# Altium PCB PCB1.PcbDoc (part 1 of 2)
Units mm, origin at the board's own origin, x right, y up, seen from the top; angles counter-clockwise.
Board outline 100 x 100 mm, 4 copper layers (Top Layer, GND, PWR, Bottom Layer), stack 0.603 mm thick; 73 components, 79 nets, 277 pads, 87 vias.
Unrouted connection lines stored in the file: 25.
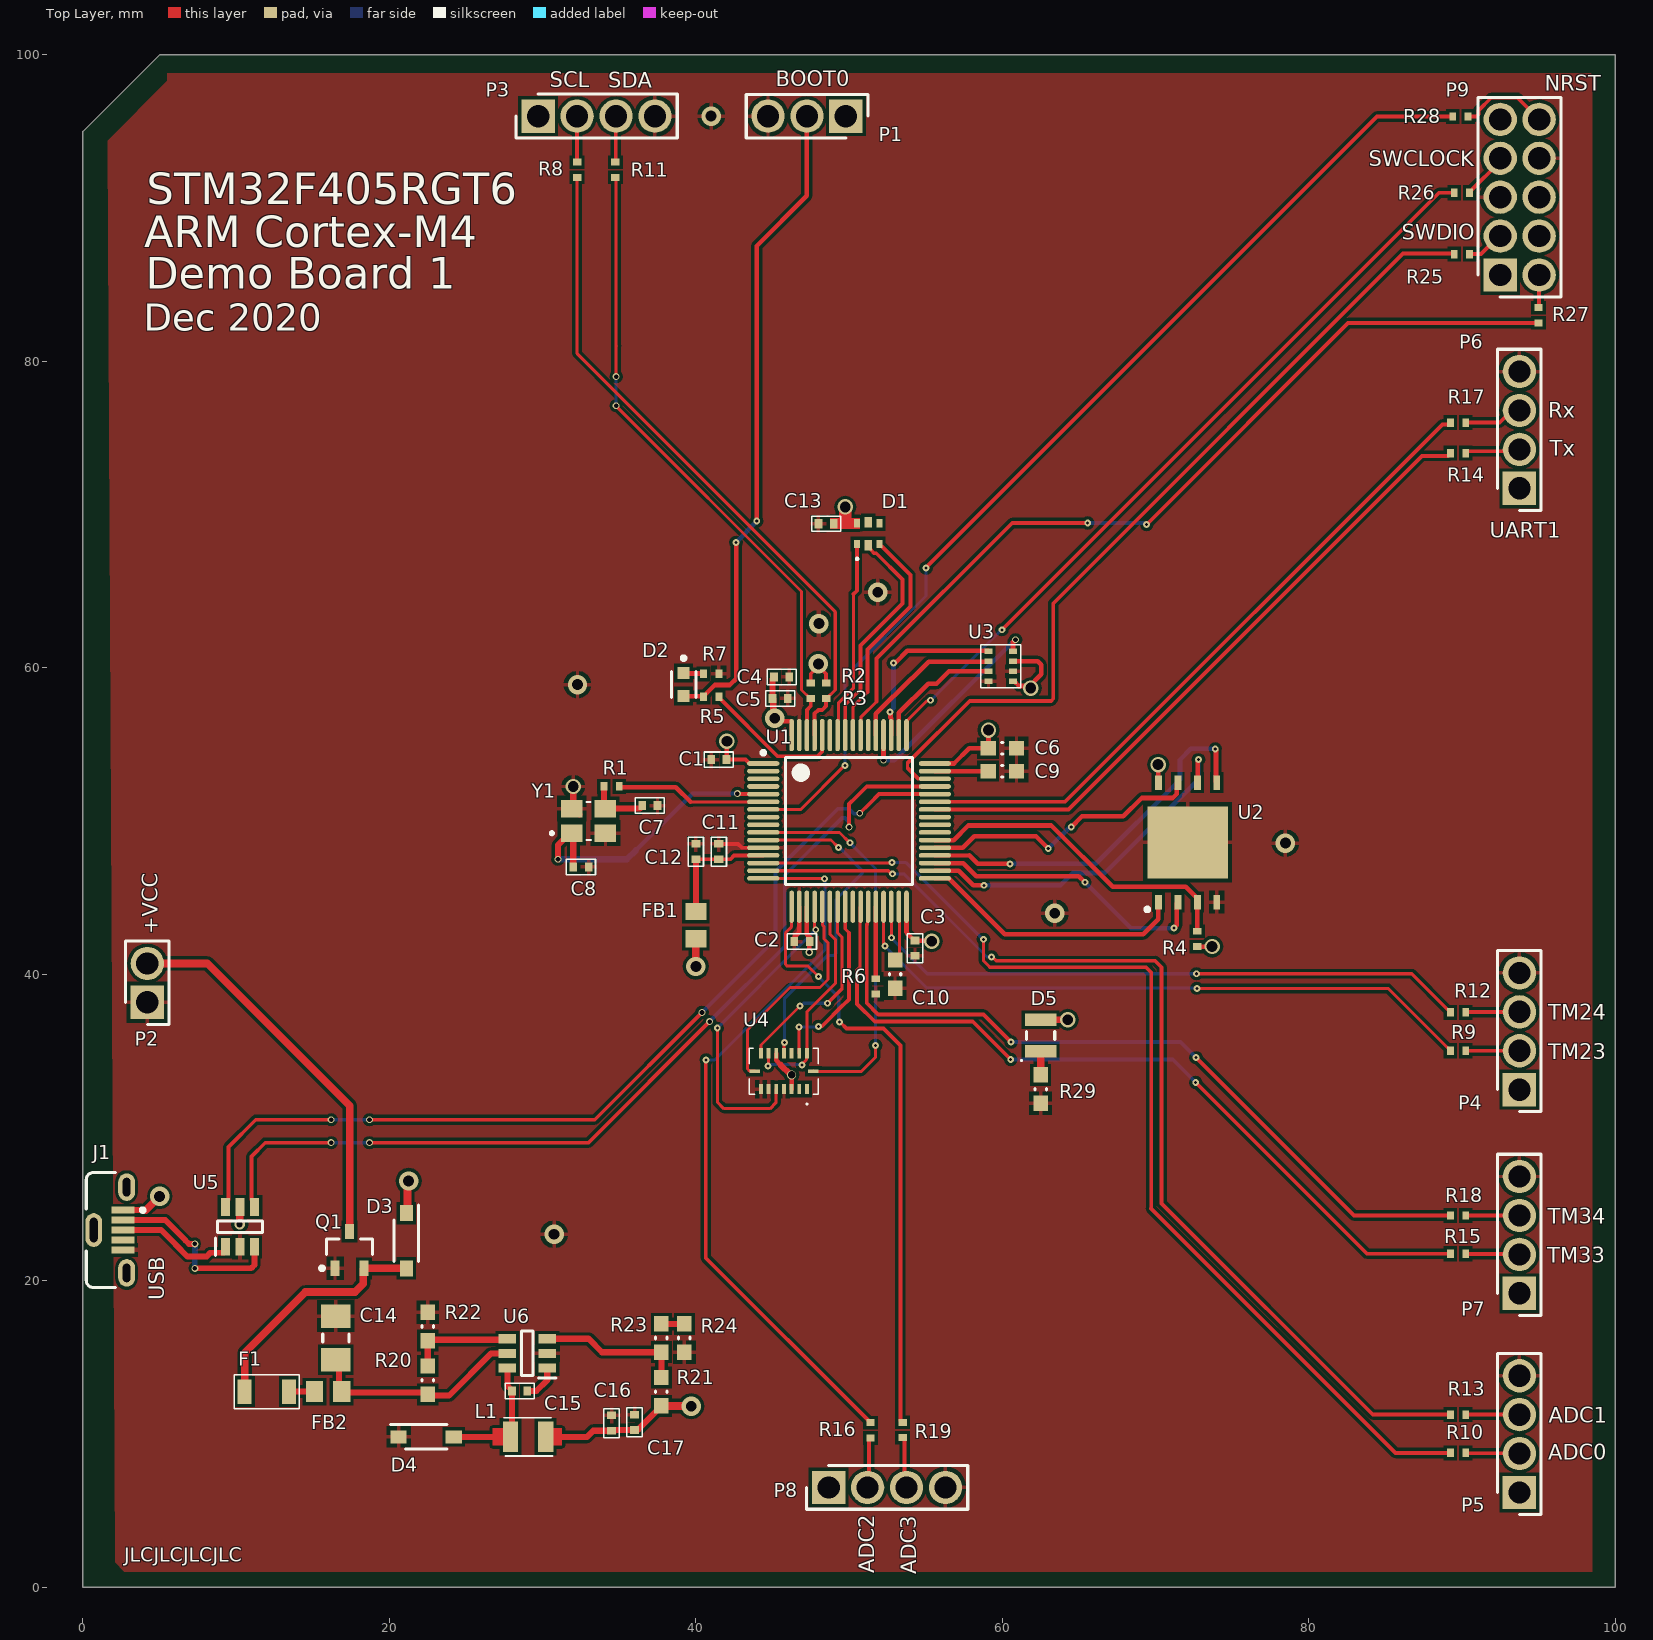
[diagram p0: Top Layer view]
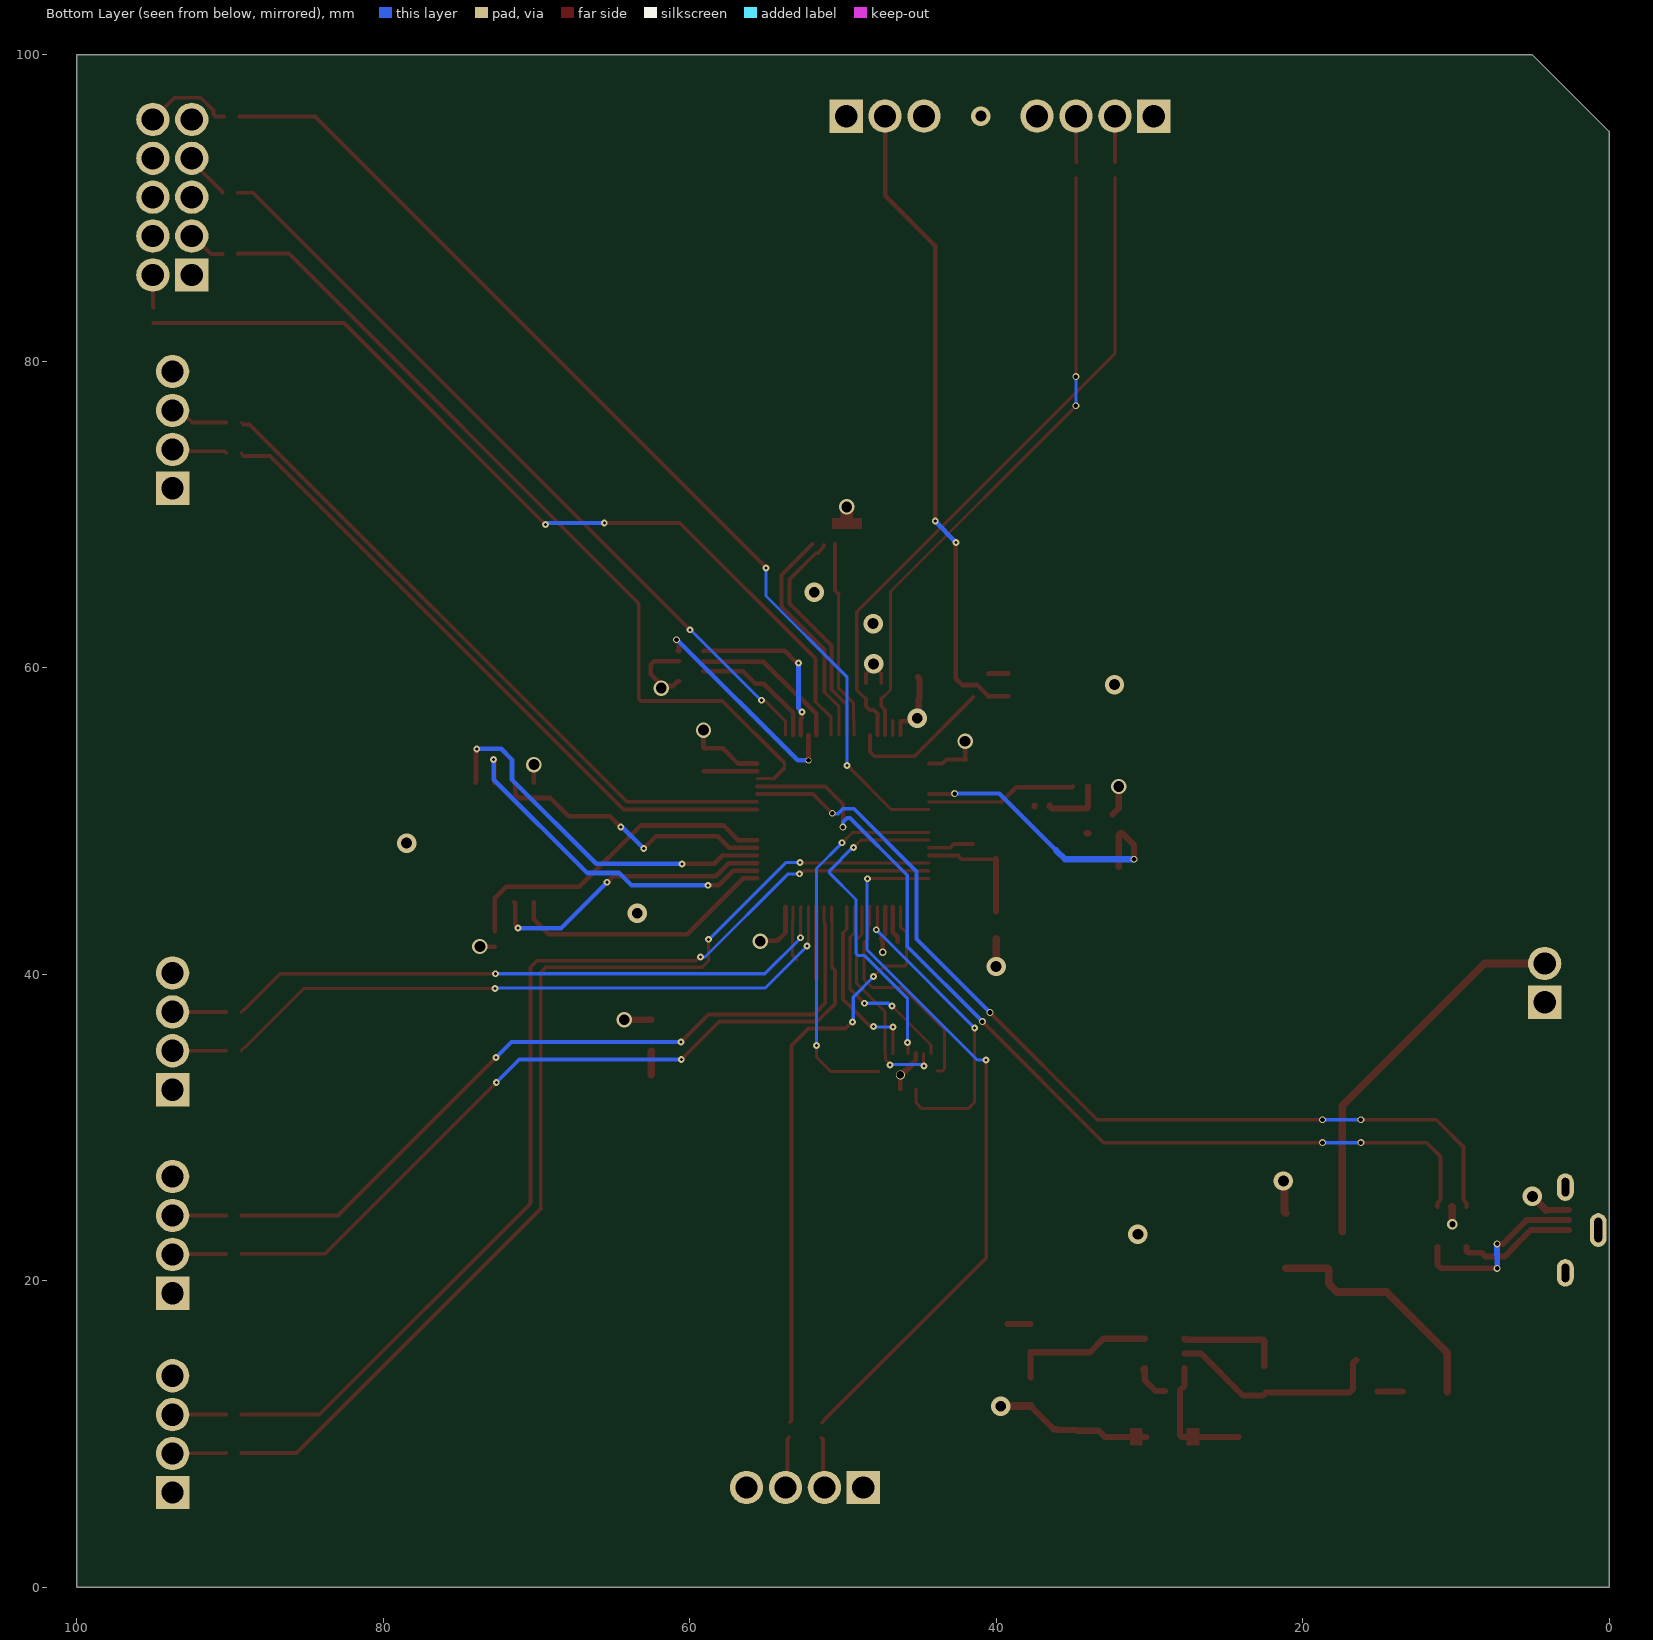
[diagram p1: Bottom Layer view, seen from below]
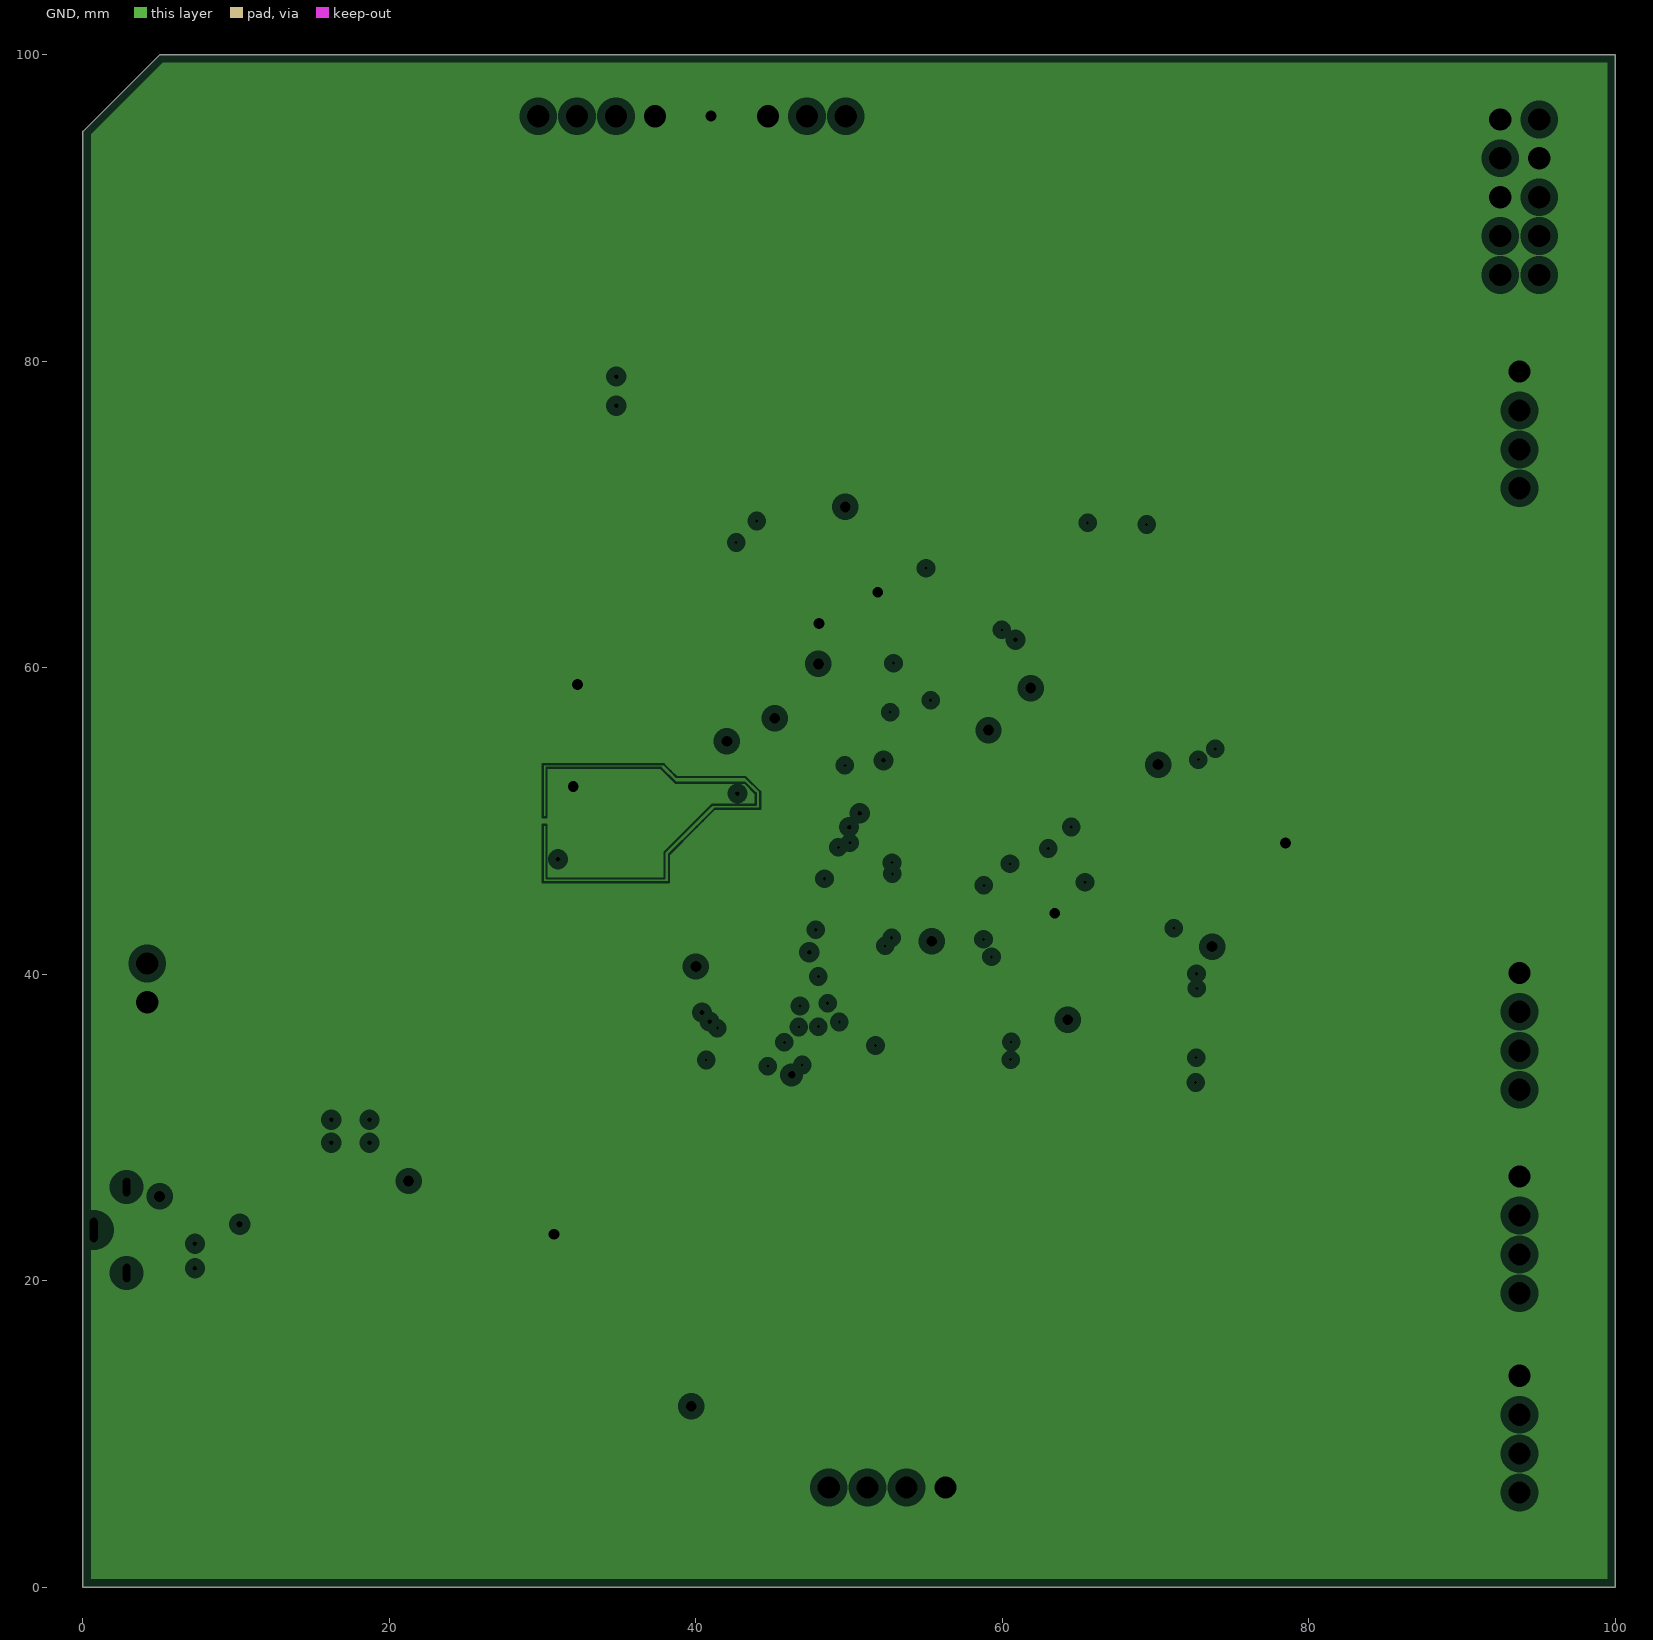
[diagram p2: GND, clearances drawn from the general rule]
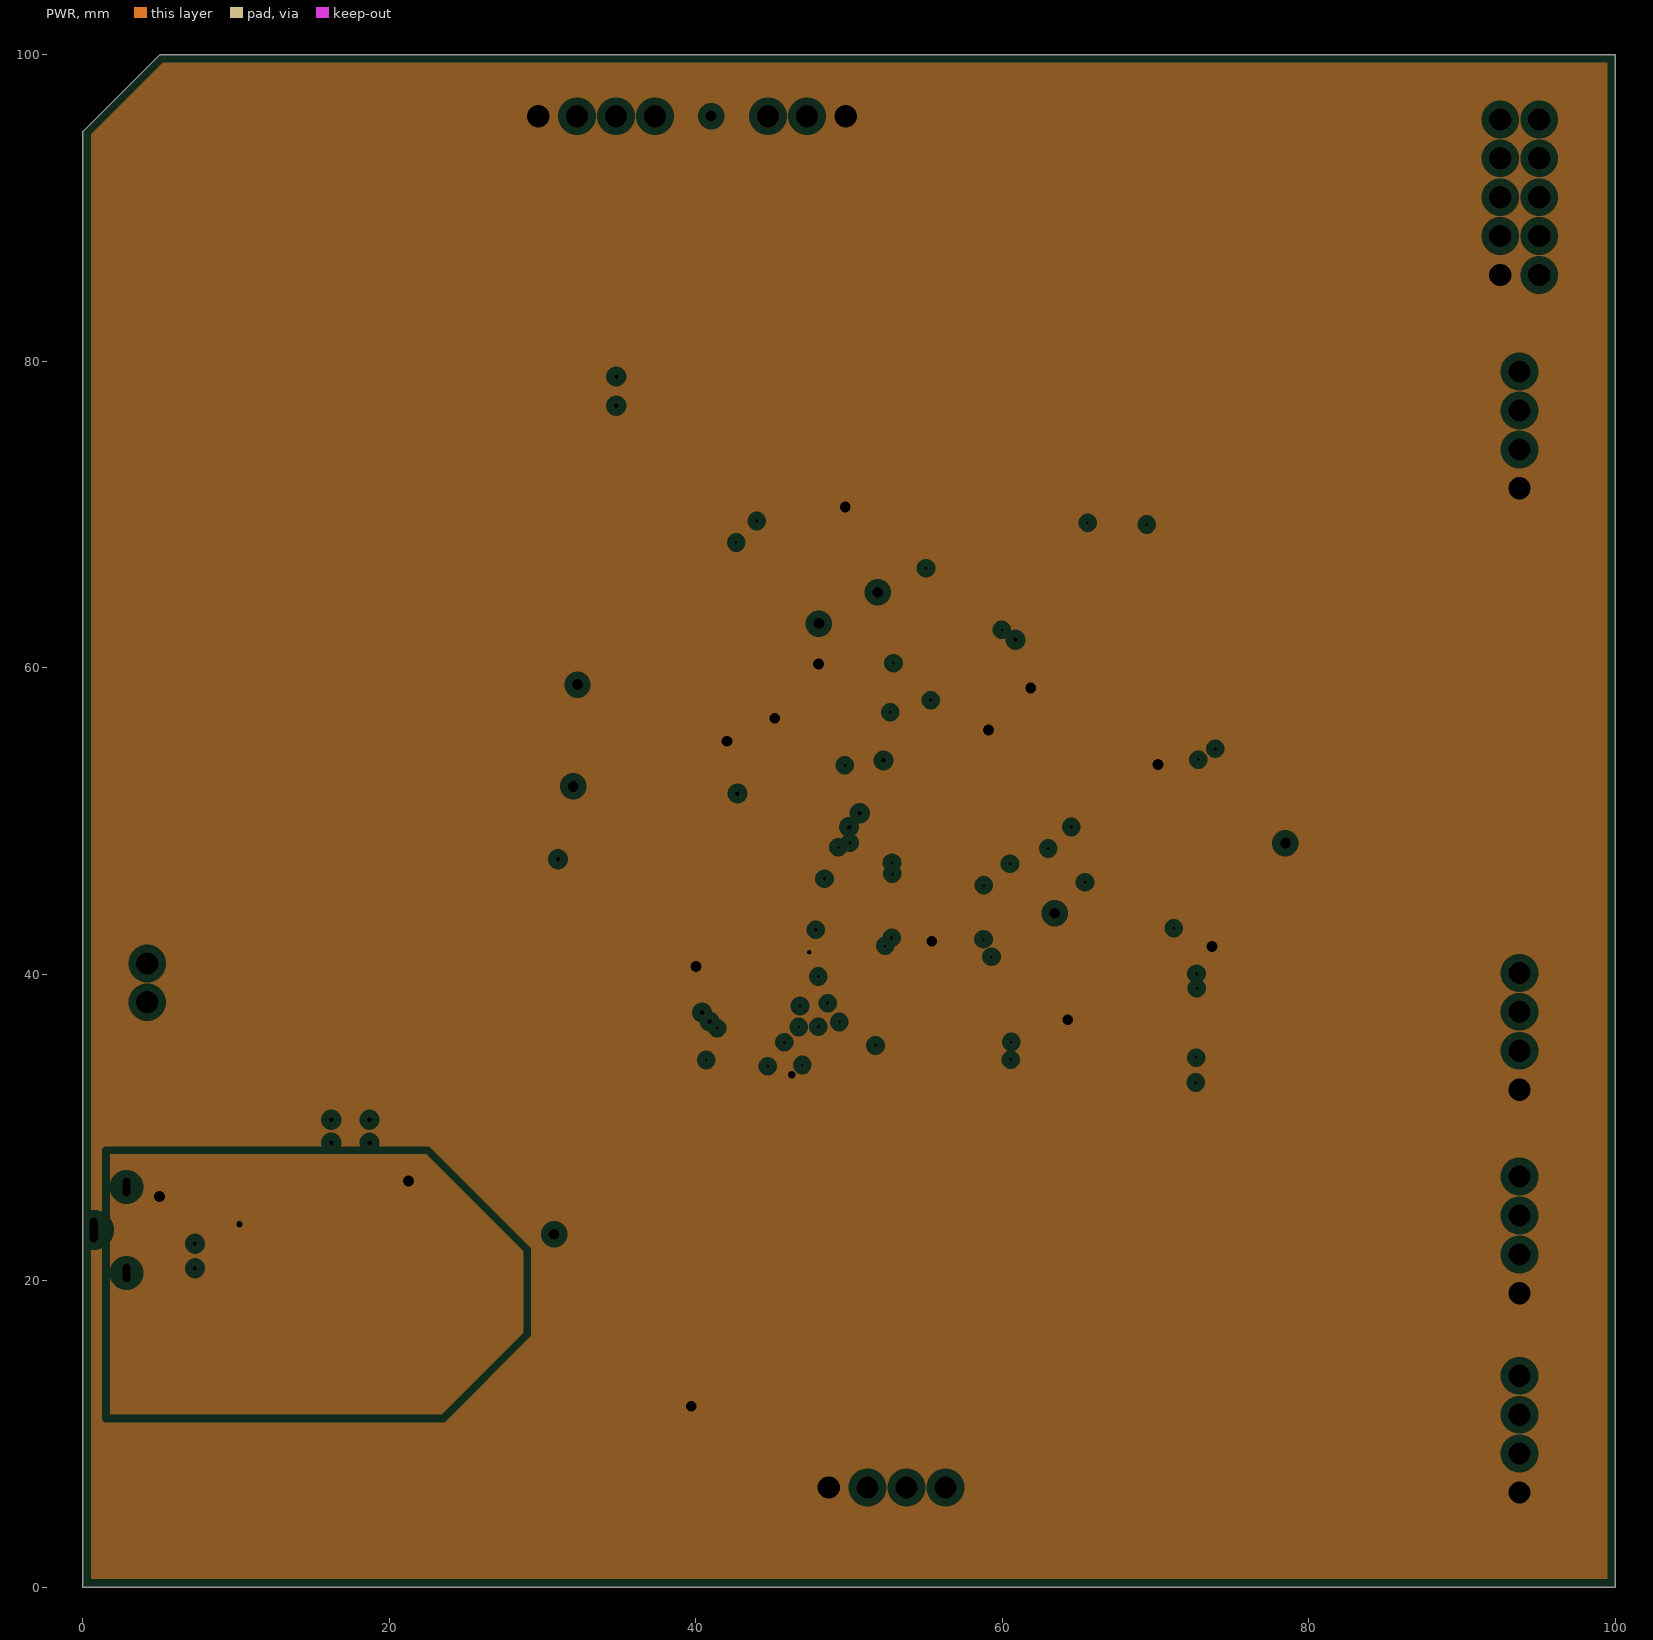
[diagram p3: PWR, clearances drawn from the general rule]
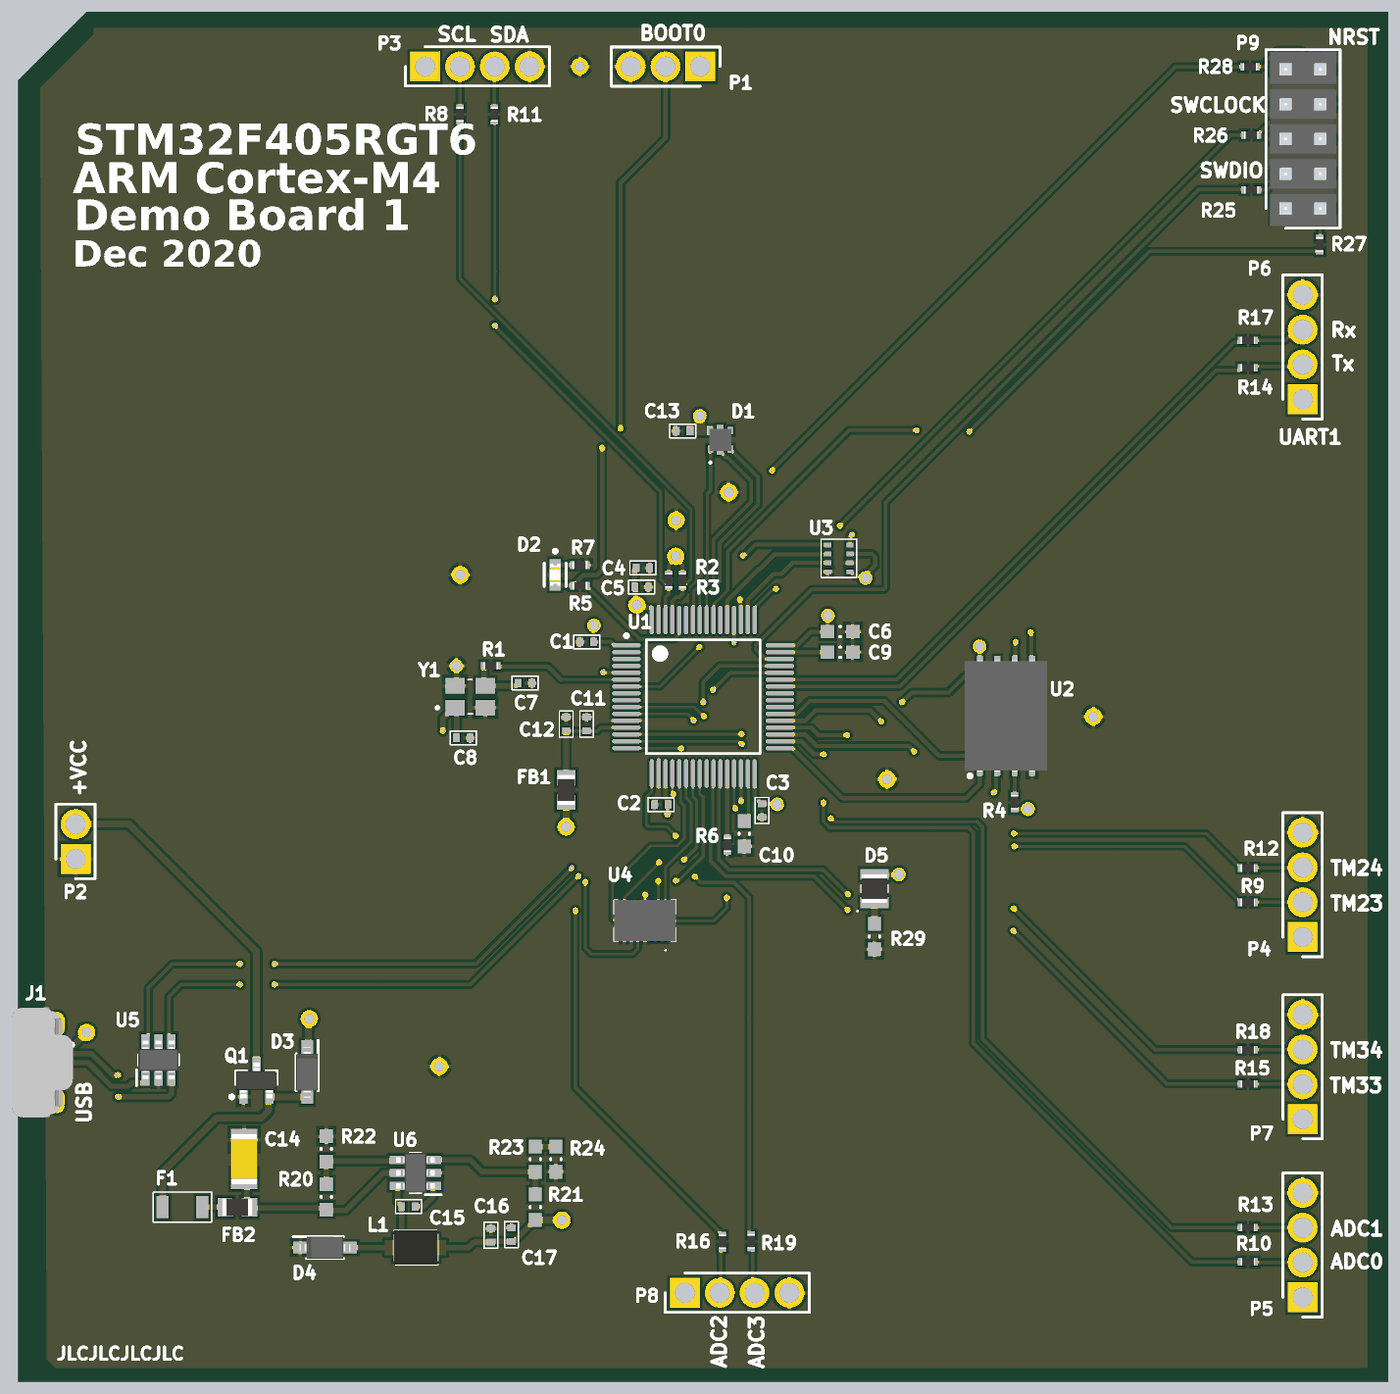
[diagram p4: 3D render of the assembled board from above, using the file's embedded part models]

## Layer stack, top to bottom
Top Solder: solder mask 0.0102, Solder Resist, Dk 3.5
Top Layer: signal copper 0.0356
Dielectric 2: prepreg 0.0711, PP-006, Dk 4.1
GND: plane copper 0.035, net GND
Dielectric 1: dielectric 0.32, FR-4, Dk 4.8
PWR: plane copper 0.035, net (Multiple Nets)
Dielectric 3: prepreg 0.0711, PP-006, Dk 4.1
Bottom Layer: signal copper 0.0356
Bottom Solder: solder mask 0.0102, Solder Resist, Dk 3.5

## Board outline
5,100 0,95 0,0 100,0 100,100

## Design rules (kind name [scope] priority, off if disabled: settings)
Clearance [All] p1: gap=0.2 ignorepadtopadclearanceinfootprint=TRUE except(0: Arc-Hole Track-Hole SMDPad-Hole THPad-Hole Via-Hole Fill-Hole Poly-Hole Region-Hole Text-Hole; 0.127: SMDPad-SMDPad; 0.15: Arc-Text Track-Text SMDPad-Text THPad-Text Via-Text Fill-Text Poly-Text Region-Text Text-Text; 0.54: THPad-THPad)
DiffPairsRouting [All] p1: maxlimit=2 minlimit=0.1 mostfreqgap=1 toplayer_minwidth=0.2 toplayer_maxwidth=0.5 toplayer_prefwidth=0.3 bottomlayer_minwidth=0.2 bottomlayer_maxwidth=0.5 bottomlayer_prefwidth=0.3 maxuncoupledlength=12.7
FanoutControl Fanout_Small [(CompPinCount < 5)] p4 off: bgadir=Out bgaviamode=Centered fanoutstyle=Auto fanoutdirection=OutThenIn viagrid=0.025 // Fanout_Small (Default Rule)
FanoutControl Fanout_Default [All] p5 off: bgadir=Out bgaviamode=Centered fanoutstyle=Auto fanoutdirection=Alternating viagrid=0.025 // Fanout_Default (Default Rule)
MinimumSolderMaskSliver [All] p1: minsoldermaskwidth=0.05
PlaneClearance [All] p1: clearance=0.508
PlaneConnect [All] p1: planeconnectstyle=Relief reliefexpansion=0.508 reliefentries=4 reliefconductorwidth=0.254 reliefairgap=0.254
PolygonConnect [All] p1: connectstyle=Relief reliefconductorwidth=0.254 reliefentries=4 polygonreliefangle="90 Angle" airgapwidth=0.254
RoutingVias [All] p1: holewidth=0.4 width=0.5 viastyle="Through Hole" minholewidth=0.2 minwidth=0.45 maxholewidth=0.711 maxwidth=1.27
SilkToSilkClearance [All] p1: silktosilkclearance=0.15
SilkToSolderMaskClearance [IsPad] p1: minsilkscreentomaskgap=0.15 clearancetoexposedcopper=TRUE
SolderMaskExpansion [All] p1: expansion=0.05 istentingtop=FALSE
UnRoutedNet [All] p1: checkbadconnections=TRUE
UnpouredPolygon [All] p1: allowunpoured=TRUE allowshelved=TRUE
Width [All] p1: maxlimit=0.5 minlimit=0.2 preferedwidth=0.3 minimp=50.000000 maximp=50.000000 favimp=50.000000
20 further rules are at their usual default settings.

## Classes and differential pairs
component class SWD: D5 P9 R25 R26 R27 R28 R29
component class "Step Down Converter": C14 C15 C16 C17 D3 D4 F1 FB2 L1 Q1 R20 R21 R22 R23 R24 U6
component class Sensors: J1 P2 P3 P4 P5 P6 P7 P8 R8 R9 R10 R11 R12 R13 R14 R15 R16 R17 R18 R19 U3 U4 U5
component class "Flight Controller": C1 C2 C3 C4 C5 C6 C7 C8 C9 C10 C11 C12 FB1 R1 R2 R3 U1 Y1
component class "Boot and Flash": C13 D1 D2 P1 R4 R5 R6 R7 U2
differential pair USB: +USB_P -USB_N
differential pair USB_CONN_D: +USB_CONN_D_P -USB_CONN_D_N

## Components (designator, comment, footprint, x,y, rotation, side; value= is the part's Value field where it differs from the comment)
C1 "100n" "CAPACITOR 0402" 41.5,54 r180 top value="10 nF"
C2 "100n" "CAPACITOR 0402" 46.925,42.125 r180 top value="10 nF"
C3 "100n" "CAPACITOR 0402" 54.3,41.7 r270 top value="10 nF"
C4 "100n" "CAPACITOR 0402" 45.6,59.4 r0 top value="10 nF"
C5 "100n" "CAPACITOR 0402" 45.5,58 r0 top value="10 nF"
C6 "2u2" "CAPACITOR 0603" 60,54.75 r180 top
C7 "12p" "CAPACITOR 0402" 37,51 r0 top value="10 nF"
C8 "12p" "CAPACITOR 0402" 32.5,47 r0 top value="10 nF"
C9 "2u2" "CAPACITOR 0603" 60,53.25 r180 top
C10 "2u2" "CAPACITOR 0603" 53,40 r90 top
C11 "1u" "CAPACITOR 0402" 41.5,48 r90 top value="10 nF"
C12 "10n" "CAPACITOR 0402" 40,48 r90 top value="10 nF"
C13 "100n" "CAPACITOR 0402" 48.5,69.4 r180 top value="10 nF"
C14 "10u" "CAPACITOR 1206" 16.5,16.25 r270 top
C15 "10n" "CAPACITOR 0402" 28.5,12.8 r0 top value="10 nF"
C16 "10n" "CAPACITOR 0402" 34.5,10.7 r90 top value="10 nF"
C17 "10n" "CAPACITOR 0402" 36,10.75 r90 top value="10 nF"
D1 "19-237/R6GHBHC-A01/2T" 19337R6GHBHCA012T 51.25,68.75 r90 top
D2 "RED" FP-LTST-C190GKT-MFG 39.2,58.9 r270 top
D3 "B5819W" SOD3716X135N 21.1,22.6 r270 top
D4 "B5819W" SOD3716X135N 22.4,9.8 r0 top
D5 "Green" "LED 0603" 62.5,36 r90 top
F1 "250 mA" "FUSE 1206" 12,12.75 r180 top
FB1 "600 @ 600 MHz" "INDUCTOR 0805" 40,43.2 r90 top
FB2 "600 @ 600 MHz" "INDUCTOR 0805" 16,12.75 r180 top
J1 "USB_B_Micro" MOLX-105133-0001_V 1.775,23.3 r270 top
L1 "10u" LQH32DN100K23L 29.05,9.8 r0 top
P1 "22-28-4033" HDRV10W90P254_1X3_1270X483X840P 49.79,96 r180 top
P2 "Conn_01x02" HDRV10W90P254_1X2_1270X483X840P 4.2,38.16 r90 top
P3 "Conn_01x04" HDRV10W90P254_1X4_1270X483X840P 29.71,96 r0 top
P4 "Conn_01x04" HDRV10W90P254_1X4_1270X483X840P 93.75,32.46 r90 top
P5 "Conn_01x04" HDRV10W90P254_1X4_1270X483X840P 93.75,6.17 r90 top
P6 "Conn_01x04" HDRV10W90P254_1X4_1270X483X840P 93.75,71.71 r90 top
P7 "Conn_01x04" HDRV10W90P254_1X4_1270X483X840P 93.75,19.17 r90 top
P8 "Conn_01x04" HDRV10W90P254_1X4_1270X483X840P 48.67,6.5 r0 top
P9 "662010231822" HDRV10W90P254_2X5_1270X483X840P 92.5,85.63 r90 top
Q1 "AO3401A" SOT95P245X110-3N 17.4,22 r90 top
R1 "47" "RESISTOR 0402" 34.5,52.25 r0 top
R2 "47" "RESISTOR 0402" 48.5,58.5 r90 top
R3 "47" "RESISTOR 0402" 47.5,58.5 r90 top
R4 "10k" "RESISTOR 0402" 72.725,42.3 r270 top
R5 "10k" "RESISTOR 0402" 41,58.1 r0 top
R6 "10k" "RESISTOR 0402" 51.75,39.2 r270 top
R7 "1k" "RESISTOR 0402" 41,59.6 r0 top
R8 "22" "RESISTOR 0402" 32.25,92.5 r90 top
R9 "22" "RESISTOR 0402" 89.75,35 r0 top
R10 "22" "RESISTOR 0402" 89.75,8.75 r0 top
R11 "22" "RESISTOR 0402" 34.75,92.5 r90 top
R12 "22" "RESISTOR 0402" 89.75,37.5 r0 top
R13 "22" "RESISTOR 0402" 89.75,11.25 r0 top
R14 "22" "RESISTOR 0402" 89.75,74 r0 top
R15 "22" "RESISTOR 0402" 89.75,21.75 r0 top
R16 "22" "RESISTOR 0402" 51.4,10.225 r270 top
R17 "22" "RESISTOR 0402" 89.75,76 r0 top
R18 "22" "RESISTOR 0402" 89.75,24.25 r0 top
R19 "22" "RESISTOR 0402" 53.5,10.25 r270 top
R20 "22" "RESISTOR 0603" 22.5,13.5 r270 top
R21 "47k" "RESISTOR 0603" 37.75,12.75 r270 top
R22 "68k" "RESISTOR 0603" 22.5,17 r270 top
R23 "15k" "RESISTOR 0603" 37.75,16.25 r270 top
R24 "270" "RESISTOR 0603" 39.25,16.25 r90 top
R25 "22" "RESISTOR 0402" 90,87 r0 top
R26 "22" "RESISTOR 0402" 90,91 r0 top
R27 "22" "RESISTOR 0402" 95,83 r90 top
R28 "22" "RESISTOR 0402" 89.9,95.975 r0 top
R29 "1k5" "RESISTOR 0603" 62.5,32.5 r90 top
U1 "STM32F405RGT6" STM-LQFP64_M 50,50 r0 top
U2 "W25N01GVZEIG" SON127P800X600X80-9N-D 72.095,48.6 r90 top
U3 "BMP280" 8-PIN-METAL-LID-LGA 59.9,60.1 r180 top
U4 "BMI088" BMI088 45.75,33.665 r180 top
U5 "USBLC6-2SC6" SOT95P280X145-6N 10.25,23.5 r90 top
U6 "MP2359DJ-LF-Z" SOT95P280X100-6N 29,15.25 r180 top
Y1 "16 MHz" XTAL_TSX-3225_16.0000MF18X-AC3 33,50 r0 top

## Footprints (in the part's own frame and the unit in brackets; to place one, negate y for a bottom-side part, rotate by r counter-clockwise, add the part's x,y. Pads: shape width x height; smd on the part's side, far side on the other; paste and mask are expansions set on the pad)
8-PIN-METAL-LID-LGA [mm]
  rect 0.5x0.35 smd: 1(0.8,0.975) 2(0.8,0.325) 3(0.8,-0.325) 4(0.8,-0.975) 5(-0.8,-0.975) 6(-0.8,-0.325) 7(-0.8,0.325) 8(-0.8,0.975)
  silkscreen extent -1.3,-1.4 1.3,1.4
19337R6GHBHCA012T [mm]
  rect 0.55x0.4 smd: 1(-0.675,0.725) 3(-0.675,-0.725) 4(0.675,0.725) 6(0.675,-0.725)
  rect 0.7x0.5 smd: 2(-0.75,0) 5(0.75,0)
  silkscreen extent -1.7,0.68 -1.6,0.77, body extent -0.8,-0.8 0.8,0.8, height 0.45
BMI088 [mm]
  rect 0.25x0.675 smd: 1(-1.5,1.165) 2(-1,1.165) 3(-0.5,1.165) 4(0,1.165) 5(0.5,1.165) 6(1,1.165) 7(1.5,1.165) 9(1.5,-1.165) 10(1,-1.165) 11(0.5,-1.165) 12(0,-1.165) 13(-0.5,-1.165) 14(-1,-1.165) 15(-1.5,-1.165)
  rect 0.675x0.25 smd: 8(1.915,0) 16(-1.915,0)
  silkscreen extent -2.25,-1.5 2.25,2.2, body extent -2.25,-1.5 2.25,1.5, height 1.55
"CAPACITOR 0402" [mm] "Chip Capacitor 0402"
  rect 0.5x0.6 smd: 1(-0.5,0) 2(0.5,0)
  silkscreen extent -0.95,-0.5 0.95,0.5
"CAPACITOR 0603" [mm] "Chip Capacitor 0603"
  rect 1x0.95 smd: 1(-0.925,0) 2(0.925,0)
  silkscreen extent -0.05,-0.38 0.05,0.38, body extent -1.05,-0.45 1.05,0.45, height 0.6
"CAPACITOR 1206" [mm] "Chip Capacitor 1206"
  rect 1.55x1.9 smd: 1(-1.425,0) 2(1.425,0)
  silkscreen extent -0.25,-0.85 0.25,0.85, body extent -1.85,-0.95 1.85,0.95, height 1.2
FP-LTST-C190GKT-MFG [mm]
  rect 0.8x0.8 smd paste+0 mask+0: 1(-0.75,0) 2(0.75,0)
  silkscreen extent -1.85,-0.8 0.85,0.8, body extent -1.25,-0.55 1.25,0.55, height 0.25
"FUSE 1206" [mm] "Chip Capacitor 1206"
  rect 0.9x1.6 smd: 1(-1.45,0) 2(1.45,0)
  silkscreen extent -2.13,-1.1 2.12,1.1
HDRV10W90P254_1X2_1270X483X840P [mm]
  rect 2.175x2.175 hole 1.45: 1(0,0)
  round 2.175 hole 1.45: 2(2.54,0)
  silkscreen extent -1.44,-1.43 4,1.44, body extent -4.87,-2.42 7.83,2.4, height 0.25
HDRV10W90P254_1X3_1270X483X840P [mm]
  rect 2.175x2.175 hole 1.45: 1(0,0)
  round 2.175 hole 1.45: 2(2.54,0) 3(5.08,0)
  silkscreen extent -1.44,-1.43 6.5,1.44, body extent -3.85,-2.4 8.85,2.43, height 0.25
HDRV10W90P254_1X4_1270X483X840P [mm]
  rect 2.175x2.175 hole 1.45: 1(0,0)
  round 2.175 hole 1.45: 2(2.54,0) 3(5.08,0) 4(7.62,0)
  silkscreen extent -1.44,-1.43 9.08,1.44, body extent -2.52,-2.46 10.18,2.36, height 0.25
HDRV10W90P254_2X5_1270X483X840P [mm]
  rect 2.175x2.175 hole 1.45: 1(0,0)
  round 2.175 hole 1.45: 2(2.54,0) 3(5.08,0) 4(7.62,0) 5(10.16,0) 6(0,-2.54) 7(2.54,-2.54) 8(5.08,-2.54) 9(7.62,-2.54) 10(10.16,-2.54)
  silkscreen extent -1.44,-3.98 11.6,1.44, body extent -1.27,-3.68 11.43,1.14, height 8.4
"INDUCTOR 0805" [mm] "Chip Inductor 0805"
  rect 1.13x1.38 smd: 1(-0.885,0) 2(0.885,0)
  body extent -1.1,-0.64 1.1,0.64, height 0.87
"LED 0603" [mm] "Chip LED 0603"
  rect 0.8x2.05 smd: 1(-1.025,0) 2(1.025,0)
  silkscreen extent -1.69,-0.93 0.25,1.29, body extent -1.05,-0.95 1.05,0.95, height 1.1
LQH32DN100K23L [mm]
  rect 1x2 smd: 1(-1.15,0) 2(1.15,0)
  Top Layer region: 2.2,0.55 1.4,0.55 1.4,-0.55 2.2,-0.55
  Top Layer region: -1.5,0.55 -2.3,0.55 -2.3,-0.55 -1.5,-0.55
  silkscreen extent -1.6,-1.25 1.6,1.25, body extent -1.6,-1.25 1.6,1.25, height 2.2
MOLX-105133-0001_V [mm] "Micro USB B, 5-Leads, Pitch 0.65mm"
  rect 0.45x1.5 smd: 1(-1.3,0.825) 2(-0.65,0.825) 3(0,0.825) 4(0.65,0.825) 5(1.3,0.825)
  oval 1.8x1.1 hole 0.5 slot 1.2 at 0 deg: 6(-2.8,1.075) 7(2.8,1.075)
  oval 2.2x1.1 hole 0.5 slot 1.6 at 0 deg: 8(0,-1.075)
  silkscreen extent -3.75,-1.56 3.75,2.25, body extent -4.02,-2.22 4,2.23, height 7.51
"RESISTOR 0402" [mm] "Chip Resistor 0402"
  rect 0.45x0.55 smd: 1(-0.5,0) 2(0.5,0)
  body extent -0.53,-0.28 0.53,0.28, height 0.35
"RESISTOR 0603" [mm] "Chip Resistor 0603"
  rect 1x0.95 smd: 1(-0.925,0) 2(0.925,0)
  silkscreen extent -0.05,-0.38 0.05,0.38, body extent -1.05,-0.45 1.05,0.45, height 0.6
SOD3716X135N [mm]
  rect 1.05x0.85 smd: 1(-1.8,0) 2(1.8,0)
  silkscreen extent -2.32,-0.8 1.35,0.8, body extent -1.85,-0.8 1.85,0.8, height 1.35
SON127P800X600X80-9N-D [mm]
  rect 0.95x0.45 smd: 1(-3.9,1.905) 2(-3.9,0.635) 3(-3.9,-0.635) 4(-3.9,-1.905) 5(3.9,-1.905) 6(3.9,-0.635) 7(3.9,0.635) 8(3.9,1.905)
  rect 4.7x5.25 smd: 9(0,0)
  silkscreen extent -4.5,2.5 -4.25,2.75, body extent -4.05,-3 4.05,3, height 0.8
SOT95P245X110-3N [mm] "SOT23, 3-Leads, Body 2.90x2.45mm, Pitch 0.95mm, IPC Medium Density"
  rect 1x0.6 smd: 1(-1.2,0.95) 2(-1.2,-0.95) 3(1.2,0)
  silkscreen extent -1.32,-1.5 0.7,1.92, body extent -1.3,-1.5 1.3,1.5, height 1.1
SOT95P280X100-6N [mm]
  rect 1.15x0.6 smd: 1(-1.3,0.95) 2(-1.3,0) 3(-1.3,-0.95) 4(1.3,-0.95) 5(1.3,0) 6(1.3,0.95)
  silkscreen extent -1.88,-1.45 0.38,1.6, body extent -1.4,-1.45 1.4,1.45, height 1
SOT95P280X145-6N [mm]
  rect 1.15x0.6 smd: 1(-1.3,0.95) 2(-1.3,0) 3(-1.3,-0.95) 4(1.3,-0.95) 5(1.3,0) 6(1.3,0.95)
  silkscreen extent -1.88,-1.46 0.38,1.6, body extent -1.4,-1.46 1.4,1.46, height 1.45
STM-LQFP64_M [mm] "Thin QFP, 64-Leads, Body 10x10mm, Pitch 0.5mm, IPC Low Density"
  oval 2.1x0.3 smd: 1(-5.6,3.75) 2(-5.6,3.25) 3(-5.6,2.75) 4(-5.6,2.25) 5(-5.6,1.75) 6(-5.6,1.25) 7(-5.6,0.75) 8(-5.6,0.25) 9(-5.6,-0.25) 10(-5.6,-0.75) 11(-5.6,-1.25) 12(-5.6,-1.75) 13(-5.6,-2.25) 14(-5.6,-2.75) 15(-5.6,-3.25) 16(-5.6,-3.75) 33(5.6,-3.75) 34(5.6,-3.25) 35(5.6,-2.75) 36(5.6,-2.25) 37(5.6,-1.75) 38(5.6,-1.25) 39(5.6,-0.75) 40(5.6,-0.25) 41(5.6,0.25) 42(5.6,0.75) 43(5.6,1.25) 44(5.6,1.75) 45(5.6,2.25) 46(5.6,2.75) 47(5.6,3.25) 48(5.6,3.75)
  oval 0.3x2.1 smd: 17(-3.75,-5.6) 18(-3.25,-5.6) 19(-2.75,-5.6) 20(-2.25,-5.6) 21(-1.75,-5.6) 22(-1.25,-5.6) 23(-0.75,-5.6) 24(-0.25,-5.6) 25(0.25,-5.6) 26(0.75,-5.6) 27(1.25,-5.6) 28(1.75,-5.6) 29(2.25,-5.6) 30(2.75,-5.6) 31(3.25,-5.6) 32(3.75,-5.6) 49(3.75,5.6) 50(3.25,5.6) 51(2.75,5.6) 52(2.25,5.6) 53(1.75,5.6) 54(1.25,5.6) 55(0.75,5.6) 56(0.25,5.6) 57(-0.25,5.6) 58(-0.75,5.6) 59(-1.25,5.6) 60(-1.75,5.6) 61(-2.25,5.6) 62(-2.75,5.6) 63(-3.25,5.6) 64(-3.75,5.6)
  silkscreen extent -5.72,-4.15 4.15,4.57, body extent -5,-5 5,5, height 1.6
XTAL_TSX-3225_16.0000MF18X-AC3 [mm]
  rect 1.4x1.15 smd: 1(-1.1,-0.8) 2(1.1,-0.8) 3(1.1,0.8) 4(-1.1,0.8)
  silkscreen extent -2.5,-1.25 0.15,1.25

## Part data
C1 C2 C3 C4 C5: library part "Capacitor 0402", "Chip Capacitor 0402", Capacitance="10 nF", Manufacturer=YAGEO, Manufacturer Part Number=CC0402KRX7R7BB103, Package=CC0402, Temperature="-55°C to +125°C", Temperature Characteristic=X7R, Temperature Coefficient=30ppm/°C, Temperature Range High=+125°C, Temperature Range Low=-55°C, Tolerance=0.1, Voltage Rating="16 V", Automotive=No, Automotive Grade=NA, Category=Cap, ComponentLink2Description=Datasheet, ComponentLink2URL=http://www.yageo.com/documents/recent/UPY-GP_NP0_16V-to-50V_16.pdf, Device Class L1="Passive Components", Device Class L2=Capacitors, Device Class L3="Ceramic Capacitors", Digikey Description="CAP CER 10000PF 16V X7R 0402", Footprint Url=http://www.yageo.com/exep/pages/download/literatures/UPY-C_GEN_24.pdf, Height=0.55mm, Ipc Land Pattern Name=CAPC10050X50, Lead Free=Yes, Material=Ceramic, Mouser Description="0402 10 nF 16 V ±10 % Tolerance X7R SMT Multilayer Ceramic Capacitor", Octopart=https://octopart.com/cc0402krx7r7bb103-yageo-192895, RoHS=TRUE
C6: library part "Chip Capacitor 0603", "Chip Capacitor, 22 pF, +/- 5%, 50 V, -55 to 125 degC, 0603 (1608 Metric), RoHS, Tape and Reel", Capacitance=22pF, Case Size/Dimension=0603, Dielectric=C0G, Manufacturer=Murata, Manufacturer Part Number=GRM1885C1H220JA01D, Package Description="2-Pin Surface Mount Device, Body 1.6 x 0.8 mm", Package Reference=603, Rated Voltage=50V, Tolerance (%)=±5%, Datasheet URL=https://datasheet.ciiva.com/11786/0900766b807a1cab-11786398.pdf, Datasheet Version=Jul-06, Manufacturer URL=http://www.murata.com/
C7 C8 C11 C12 C13 C15 C16 C17: library part "Capacitor 0402", "Chip Capacitor 0402", Capacitance="10 nF", Manufacturer=Yageo, Manufacturer Part Number=CC0402KRX7R7BB103, Package=CC0402, Temperature="-55°C to +125°C", Temperature Characteristic=X7R, Temperature Coefficient=30ppm/°C, Temperature Range High=+125°C, Temperature Range Low=-55°C, Tolerance=0.1, Voltage Rating="16 V", Automotive=No, Automotive Grade=NA, Category=Cap, ComponentLink2Description=Datasheet, ComponentLink2URL=http://www.yageo.com/documents/recent/UPY-GP_NP0_16V-to-50V_16.pdf, Device Class L1="Passive Components", Device Class L2=Capacitors, Device Class L3="Ceramic Capacitors", Digikey Description="CAP CER 10000PF 16V X7R 0402", Footprint Url=http://www.yageo.com/exep/pages/download/literatures/UPY-C_GEN_24.pdf, Height=0.55mm, Ipc Land Pattern Name=CAPC10050X50, Lead Free=Yes, Material=Ceramic, Mouser Description="0402 10 nF 16 V ±10 % Tolerance X7R SMT Multilayer Ceramic Capacitor", Octopart=https://octopart.com/cc0402krx7r7bb103-yageo-192895, RoHS=TRUE
C9 C10: library part "Capacitor 0603", "Chip Capacitor, 22 pF, +/- 5%, 50 V, -55 to 125 degC, 0603 (1608 Metric), RoHS, Tape and Reel", Capacitance=22pF, Case Size/Dimension=0603, Dielectric=C0G, Manufacturer=Murata, Manufacturer Part Number=GRM1885C1H220JA01D, Package Description="2-Pin Surface Mount Device, Body 1.6 x 0.8 mm", Package Reference=603, Rated Voltage=50V, Tolerance (%)=±5%, Datasheet URL=https://datasheet.ciiva.com/11786/0900766b807a1cab-11786398.pdf, Datasheet Version=Jul-06, Manufacturer URL=http://www.murata.com/
C14: library part "Capacitor 1206", "Chip Capacitor, 1206", Capacitance=22pF, Case Size/Dimension=0603, Dielectric=C0G, Manufacturer=Murata, Manufacturer Part Number=GRM1885C1H220JA01D, Package Description="2-Pin Surface Mount Device, Body 1.6 x 0.8 mm", Package Reference=603, Rated Voltage=50V, Tolerance (%)=±5%, Datasheet URL=https://datasheet.ciiva.com/11786/0900766b807a1cab-11786398.pdf, Datasheet Version=Jul-06, Manufacturer URL=http://www.murata.com/
D1: library part "LED RGB", "LED RGB CLEAR CHIP SMD R/A", Colour="Red, Green, Blue", Forward Current=20mA, Forward Voltage=2/3.3/3.3V, Manufacturer=Everlight, Manufacturer Part Number=12-23A/R6GHBHC-A01/2D, Package=12-23A, Power Dissipation=60/110/110mW, Reverse Voltage=5V, Temperature="-40°C to +85°C", Temperature Range High=+85°C, Temperature Range Low=-40°C, Automotive=No, Category=Diode, ComponentLink2Description=Datasheet, ComponentLink2URL=https://media.digikey.com/pdf/Data%20Sheets/Everlight%20PDFs/12-23A,R6GHBHC-A01,2D.pdf, Device Class L1=Optoelectronics, Device Class L2=LEDs, Device Class L3=unset, Digikey Description="LED RGB CLEAR CHIP SMD R/A", Height=2.1mm, Lead Free=Yes, Led Orientation="Side View", Luminous Intensity=90/180/72mcd, Mouser Description="Standard LEDs - SMD RGB WATER CLEAR RIGHT ANGLE LENS", Octopart=https://octopart.com/12-23a%2Fr6ghbhc-a01%2F2d-everlight-10561613, Peak Emmision Wavelength=632/518/468nm, RoHS=TRUE, Viewing Angle=120°, Wavelength=624/525/470nm
D2: library part CMP-22017-000005-1, "LED GREEN CLEAR CHIP SMD", Case Code (Imperial)=0603, Case Code (Metric)=1608, Color=Green, Forward Current=30mA, Forward Voltage=2.1V, Lens Color=Colorless, Max Operating Temperature=85°C, Min Operating Temperature=-55°C, Package Quantity=1, Power Dissipation=100mW, Reverse Voltage=5V, Test Current=10mA, Voltage=2V, Case/Package=0603, Depth=0.8mm, Dominant Wavelength=569nm, Height=0.8mm, Illumination Color=Green, Lead Free="Lead Free", Length=1.6mm, Lens Style=Clear, Lens Transparency=Clear, Luminous Intensity=6mcd, Mount="Surface Mount", Number of Elements=1, Number of LEDs=1, Number of Pins=2, Packaging="Tape and Reel", Power Rating=100mW, Radiation Hardening=No, Viewing Angle=130°, Wavelength=565nm, Width=0.8mm
D3 D4: library part "Schottky Barrier Rectifier", "Schottky Barrier Rectifier, 20 V, 1 A, -65 to 150 degC, 2-Pin DO-214AC (SMA), RoHS, Tape and Reel", Case/Package=SMA, Forward Current=1A, Forward Voltage=500mV, Manufacturer="Vishay Intertechnology", Manufacturer Part Number=SS12-E3\61T, Max Operating Temperature=125°C, Max Surge Current=40A, Min Operating Temperature=-65°C, Package Description="2-Pin Surface Mount Device, Body 4.245 x 2.665 mm", Package Quantity=1800, Package Reference="DO-214AC (SMA)", Peak Reverse Current=6mA, Component Type=Diodes, Datasheet URL=http://www.vishay.com/docs/88746/ss12.pdf, Datasheet Version=Aug-15, Manufacturer URL=http://www.vishay.com/, Mounting Technology=SM, Packaging=TapeandReel, Pins=2, RoHS Compliant=True
D5: library part "LED 0805", "LED 0805", Case Code (Imperial)=0603, Case Code (Metric)=1608, Forward Current=30mA, Forward Voltage=2.1V, Lens Color=Colorless, Manufacturer="Vishay Lite-On", Manufacturer Part Number=LTST-C190GKT, Max Operating Temperature=85°C, Min Operating Temperature=-55°C, Package Quantity=1, Power Dissipation=100mW, Reverse Voltage=5V, Test Current=10mA, Voltage=2V, Case/Package=0603, Color=Green, Depth=0.8mm, Dominant Wavelength=569nm, Height=0.8mm, Illumination Color=Green, Lead Free="Lead Free", Length=1.6mm, Lens Style=Clear, Lens Transparency=Clear, Luminous Intensity=6mcd, Mount="Surface Mount", Number of Elements=1, Number of LEDs=1, Number of Pins=2, Packaging="Tape and Reel", Power Rating=100mW, Radiation Hardening=No, Viewing Angle=130°, Wavelength=565nm, Width=0.8mm
F1: library part "Fuse 1206", "NANO2(R) Slo-Blo(R) Fuse, 0.5 A, 125 V, -55 to 125 degC, 2-Pin SMD, RoHS, Tape and Reel", Current Rating=0.5A, Manufacturer=Littelfuse, Manufacturer Part Number=0452.500MRL, Operating Temp Range=-55to+125°C, Package Description="2-Pin Surface Mount Device, Body 6.1 x 2.69 mm", Package Reference=0452, Working Voltage-Max=125V, Datasheet URL=http://download.siliconexpert.com/pdfs/2015/7/2/10/39/10/885/ltf_/manual/4322647674859060843226474844920160littelfuse_fuse_452_454_datasheet.pdf.pdf.pdf, Datasheet Version=07/2015, Manufacturer URL=http://www.littelfuse.com/, Mounting Technology=SurfaceMount, Response Characteristic=Slo-Blo, Size=6.10x2.69mm
FB1 FB2: library part "Ferrite Bead", "Ferrite Bead Murata BLM21AG601SN1D", Case Size/Dimension=0805, DC Resistance=0.6, Inductance-Nom=10H, Manufacturer=TDK, Manufacturer Part Number=MLZ2012A1R0MT000, Package Description="2-Pin Surface Mount Device, Body 2 x 1.25 mm", Package Reference=IND0805, Rated Current-Max=100mA, Tolerance (%)=20%, Datasheet URL=http://psearch.en.murata.com/inductor/product/LQM21FN100M70%23.pdf, Datasheet Version=05/2016, Manufacturer URL=http://www.murata.com/, Mounting Technology=SurfaceMount
J1: "Micro USB B Type Receptacle, -55 to 85 degC, 5-Pin SMD, RoHS, Tape and Reel", Color=Black, Current Rating=1.8A, Flammability Rating=UL94V-0, Insulation Resistance=1000MOhms, Manufacturer="Amphenol FCI", Manufacturer Part Number=10118193-0001LF, Operating Temperature Range=-55Cto+85C, Brand=FCI, Connector Type=MicroUSBTypeBreceptacle, Contact Material=CopperAlloy, Contact Plating=Gold, Datasheet URL=http://datasheet.octopart.com/10118193-0001LF-FCI-datasheet-55953155.pdf, Datasheet Version="Rev. C, 05/2015", Factory Pack Quantity=1200, Gender=Female, Manufacturer URL=http://www.fci.com/, Mounting Angle=Right, Number of Contacts=5Contact, Packaging=Reel, Product=MicroUSBTypeBConnectors, Product Category=USBConnectors, RoHS=Details, Standard=USB2.0, Termination Style=SMD/SMT
L1: library part "Fixed Inductor", "LQH32CN100K33L 10uh", Case Size/Dimension=0805, DC Resistance=0.6, Inductance-Nom=10H, Manufacturer=TDK, Manufacturer Part Number=MLZ2012A1R0MT000, Package Description="2-Pin Surface Mount Device, Body 2 x 1.25 mm", Package Reference=IND0805, Rated Current-Max=100mA, Tolerance (%)=20%, Datasheet URL=http://psearch.en.murata.com/inductor/product/LQM21FN100M70%23.pdf, Datasheet Version=05/2016, Manufacturer URL=http://www.murata.com/, Mounting Technology=SurfaceMount
P1: library part "Male Header 01x03", "Male Header, Pitch 2.54 mm, 1 x 3 Position, Height 8.38 mm, Tail Length 3.18 mm, RoHS, Bulk", Colour=Black, Current Rating="4 A", Manufacturer=Molex, Max Operating Temperature="75 degC", Min Operating Temperature="0 degC", Package Quantity=1, Voltage Rating="250 V", ComponentLink1Description="Manufacturer URL", ComponentLink1URL=http://www.molex.com/, ComponentLink2Description=Datasheet, ComponentLink2URL=http://www.molex.com/pdm_docs/sd/022284033_sd.pdf, Contact Finish=Gold, Contact Material=Brass, Contact Plating=Gold, DatasheetVersion="Rev. G, 01/2012", Height="8.38 mm", Lead Pitch="0.1 inch", Length="7.62 mm", Manufacturer Part Number=22-28-4033, Mount="Through Hole", Mounting Technology="Through Hole", PackageDescription="Male Header, Pitch 2.54 mm, 1 x 3 Position, Height 8.38 mm, Tail Length 3.18 mm", PackageReference=22-28-4033, Packaging=Bulk, Pins=3, REACH SVHC=Unknown, RoHSCompliant=true, Rows=1
P2: library part "Male Header 01x02", "Male Header, Pitch 2.54 mm, 1 x 2 Position, Height 8.21 mm, Tail Length 3.05 mm, -65 to 105 degC, RoHS, Bulk", Case\/Package=100, Colour=Black, Current Rating=3A, Flammability Rating=UL94V-0, High Temperature Housing=Yes, Manufacturer="TE Connectivity", Manufacturer Part Number=5-146280-2, Max Current Rating=5A, Max Operating Temperature=105degC, Min Operating Temperature=-65degC, Package Description="Male Header, Pitch 2.54 mm, 1 x 2 Position, Height 8.21 mm, Tail Length 3.05 mm", Package Quantity=500, Approvals=CSA, Board Standoff=No(Without), Connector Type=Header, Contact Gender=Male, Contact Material=CopperAlloy, Contact Mating Length=0.23inch, Contact Plating=Matte, Contact Protection=No(Without), Contact Shape=Square, Datasheet URL=http://www.te.com/commerce/DocumentDelivery/DDEController?Action=showdoc&DocId=Customer+Drawing%7F146280%7FH1%7Fpdf%7FEnglish%7FENG_CD_146280_H1.pdf%7F5-146280-2, Datasheet Version="Rev. H1, 08/2016", Depth=2.34mm, Gasket=No(Without), High Speed Serial Data Connector=No, Housing Colour=Black, Housing Material=Polymer, Keyed=No, Length=4.67mm, Manufacturer URL=http://www.te.com/, Mating Alignment=No(Without), Mating Connector Lock=No(Without), Mating Post Length=0.23inch, Mount=ThroughHole, Mounting Technology=ThroughHole, Number of Contacts=2, Number of Positions=2, Number of Rows=1, Orientation=Straight, Package Reference=5-146280-2, Packaging=Carton, Panel Mount Retention=No(Without), PCB Mount Retention=Without, PCB Mounting Orientation=Vertical, PCB Thickness=0.063inch, Pitch=2.54mm, Radiation Hardening=No, RoHSCompliant=true, Row Spacing=2.54mm, Selectively Loaded=No(Without), Stabilizers=No(Without), Termination=ThroughHole, Termination Post Length=0.12inch
P3 P4 P5 P6 P7 P8: library part "Male Header 01x04", "Horizontal Surface Mount Header, -55 to 125 degC, 2 mm Pitch, 4-Pin, Male, RoHS", Manufacturer=Samtec, Manufacturer Part Number=MMT-104-01-L-SH, Temperature Range="-55 to 125 degC", ComponentLink1Description="Manufacturer URL", ComponentLink1URL=http://www.samtec.com, ComponentLink2Description=Datasheet, ComponentLink2URL=http://d2a072wq521u33.cloudfront.net/catalog_english//MMT_SM.PDF, ComponentLink3Description="Package Specification", ComponentLink3URL=http://www.samtec.com/documents/webfiles/cpdf/MMT-1XX-XX-XX-XX-XX-XXX-X-XX-MKT.pdf, DatasheetVersion=F-214, Mounting Technology="Surface Mount", Orientation=Horizontal, PackageDescription="2mm Horizontal Terminal Surface Mount Strip ASSEM", PackageReference=MMT-104-01-X-SH, PackageVersion="CY, 12/2000", PartNumber=MMT-104-01-L-SH, Pitch="2 mm", RoHS=True
P9: library part "Male Header 02x05", "SMT Male Header WR-MPC3, with SMT Solder Tabs, Vertical, Dual Row, pitch 3 mm, 10 pins", Contact Resistance=10mOhm, Manufacturer="Wurth Electronics", Operating Temperature=-40to105degC, Working Voltage=250VAC, Datasheet URL=https://katalog.we-online.de/em/datasheet/6620xx231822.pdf, Gender=Male, Manufacturer Part Number=662010231822, Manufacturer URL=http://www.we-online.de, Mounting Technology=SMT, Orientation=Vertical, Package Reference=662010231822, Packaging=Tray, Part Number=662010231822, Pin Number=10, Pitch=3mm, Publisher=WurthElektronik
Q1: library part "P-Channel MOSFET", "P-Channel MOSFET, 30 V, 4 A, -55 to 150 degC, 3-Pin SOT-23-3L, RoHS, Tape and Reel", Continuous Drain Current=4A, Drain-Source On-Volt=30V, Frequency (Max)=NotRequiredMHz, Gate-Source Voltage (Max)=?12V, Manufacturer="Alpha & Omega Semiconductor", Operating Temp Range=-55Cto150C, Operating Temperature Classification=Military, Output Power (Max)=NotRequiredW, Package Description="3-Pin Small Outline Transistor, Body 2.95 x 1.6 mm, Pitch 0.95 mm", Package Reference=SOT-23-3L, Package Type=SOT-23, Power Dissipation=1.4W, Power Gain=NotRequireddB, Channel Mode=Enhancement, Datasheet URL=http://www.aosmd.com/res/data_sheets/AO3401A.pdf, Datasheet Version="Rev. 3, 03/2011", Drain Current (Max)=4A, Drain Efficiency=NotRequired%, Drain-Source On-Res=0.044ohm, Manufacturer Part Number=AO3401A, Manufacturer URL=http://www.aosmd.com/, Mounting=SurfaceMount, Mounting Technology=SurfaceMount, Noise Figure=NotRequireddB, Number of  Elements=1, Package URL=http://www.aosmd.com/res/packaging_information/SOT-23-3L.pdf, Pin Count=3, Polarity=P, Rad Hardened=No, Type=PowerMOSFET
R1 R2 R3 R4 R5 R6 R7 R8 R9 R10 R11 R12 R13 R14 R15 R16 R17 R18 R19 R25 R26 R27 R28: library part "Resistor 0402", "Chip Resistor 0402", Manufacturer=Vishay, Manufacturer Part Number=CRCW0402120RFKED, Part Number=CRCW0402120RFKED
R20 R21 R22 R23 R24 R29: library part "Resistor 0603", "Chip Resistor 0603", Manufacturer=Vishay, Manufacturer Part Number=CRCW0402120RFKED, Part Number=CRCW0402120RFKED
U1: library part "STM32 ARM Cortex-M4", "ARM Cortex-M4 32-bit MCU+FPU, 210 DMIPS, 1024 kB Flash, 192 kB Internal RAM, 51 I/Os, 64-pin LQFP, -40 to 85 degC, Tray", I/Os (High Current)=51, Manufacturer=STMicroelectronics, Operating Frequency(F) (Processor speed) (MHz)=168, Supply Voltage(Vcc) max (V)=3.6, Supply Voltage(Vcc) min (V)=1.8, ComponentLink1Description="Manufacturer URL", ComponentLink1URL=http://www.st.com/web/en/home.html, ComponentLink2Description=Datasheet, ComponentLink2URL=http://www.st.com/st-web-ui/static/active/en/resource/technical/document/datasheet/DM00037051.pdf, ComponentLink3Description="Package Specification", ComponentLink3URL=http://www.st.com/st-web-ui/static/active/en/resource/technical/document/datasheet/DM00037051.pdf, Core="ARM Cortex-M4", D/A Converter=2x12-bit, DatasheetVersion="Rev. 4", FLASH Size (Prog) (kB)=1024, Internal RAM Size (kB)=192, Manufacturer Part Number=STM32F405RGT6, Mounting Technology="Surface Mount", PackageDescription="64-Pin Low Profile Quad Flat Package, 10 x 10 mm Body, 0.5 mm Pitch", PackageReference=LQFP64, PackageVersion="Rev. 4, 06/2013", Packing=Tray, PartNumber=STM32F405RGT6
U2: "Flash memory", Built_By=EMA_Cory, Copyright="Copyright (C) 2018 Accelerated Designs. All rights reserved", Datasheet=https://www.winbond.com/resource-files/w25n01gv%20revl%20050918%20unsecured.pdf, Manufacturer_Part_Number=W25N01GVZEIG, RefDes=RefDes, SourceLibrary=Winbond_2020-02-06, Type=DEV, Vendor=Winbond
U3: "Digital Pressure Sensor,", Manufacturer=Bosch, Datasheet URL=http://datasheet.octopart.com/BMP280-Bosch-datasheet-41546027.pdf, Datasheet Version="Rev. 1.14, 05/2015", Manufacturer Part Number=BMP280, Manufacturer URL=http://www.bosch-sensortec.com
U4: "Inertial Measurement Unit BOSCH", Built_By=EMA_Matt, Copyright="Copyright (C) 2018 Accelerated Designs. All rights reserved", Manufacturer_Part_Number=BMI088, RefDes=RefDes, Revision=1, SourceLibrary=Updates_to_database_2020-10-21, Type=DEV, Vendor=Bosch
U5: library part "ESD protection", "Very low capacitance ESD protection, 3.5 pF, -40 to 125 degC, 6-Pin SOT23, RoHS, Tape and Reel", Capacitance Value=3.5pF, Clamping Voltage=17V, Leakage Current=0.15uA, Manufacturer=STMicroelectronics, Operating Temp Range=-40Cto125C, Operating Temperature Classification=Automotive, Operating Temperature Max Deg. C=125C, Operating Temperature Min Deg. C=-40C, Package / Case=SOT-23, Package Description="6-Pin Small Outline Transistor, Body 2.925 x 1.625 mm, Pitch 0.95 mm", Package Reference=SOT23-6L, Peak Pulse Current=5A, Reverse Breakdown Voltage=6V, Reverse Stand-off Voltage=5V, Test Current (It)=1mA, Clamping Voltage (Max)=17V, Configuration=Dual, Datasheet URL=http://www.st.com/st-web-ui/static/active/en/resource/technical/document/datasheet/CD00050750.pdf, Datasheet Version="Rev. 5, 10/2011", Direction Type=Uni-Directional, Leakage Current (Max)=0.15uA, Manufacturer Part Number=USBLC6-2SC6, Manufacturer URL=http://www.st.com/, Mounting=SurfaceMount, Mounting Style=SurfaceMount, Number of Elements=1, Packaging=TapeandReel, Pin Count=6, Polarity=Uni-Directional, Product Depth (mm)=1.75mm, Product Height (mm)=1.3mm, Product Length (mm)=3.05mm, Rad Hardened=No, Suppressor Type=DiodeArrays, Working Voltage=5V, Working Voltage (Max)=5V
U6: "Regulator"
Y1: library part TSX-3225_16.0000MF18X-AC3, "16MHz Â±10ppm Crystal 9pF 60 Ohms 4-SMD, No Lead", Package="SMD-4 Epson", Availability=Unavailable, MF=EPSON, MP="TSX-3225 16.0000MF18X-AC3", Price=None, SnapEDA_Link=https://www.snapeda.com/parts/TSX-3225%2016.0000MF18X-AC3/EPSON/view-part/105674/?ref=snap

## Via types
v1: diameter 0.45, hole 0.2, Top Layer to Bottom Layer, 46 vias
v2: diameter 0.45, hole 0.3, Top Layer to Bottom Layer, 15 vias
v3: diameter 1.27, hole 0.711, Top Layer to Bottom Layer, 13 vias
v4: diameter 1, hole 0.711, Top Layer to Bottom Layer, 9 vias
v5: diameter 0.5, hole 0.3, Top Layer to Bottom Layer, 1 vias
v6: diameter 0.7, hole 0.4, Top Layer to Bottom Layer, 1 vias
v7: diameter 0.6, hole 0.5, Top Layer to Bottom Layer, 1 vias
v8: diameter 0.4, hole 0.3, Top Layer to Bottom Layer, 1 vias

## Nets (pads, with @x,y where several pads share a name; then routed paths per layer and width w, separated by ;. In a path a pad name is that pad's centre, name@x,y a point inside that pad or via, vN(x,y) a via of type N, cw(c..) or ccw(c..) an arc to the next point about the centre after c; other vN are vias at no path point)
+3V3: C1.1 C2.1 C3.1 C4.1 C5.1 C6.2 C13.1 C16.1 C17.1 D1.4 D5.2 FB1.1 L1.2 P1.1 P3.1 P4.1 P5.1 P6.1 P7.1 P8.1 P9.1 R2.2 R3.2 R4.2 R21.2 U1.1 U1.19 U1.32 U1.48 U1.64 U2.8 U3.6 U3.8 U4.3 U4.11 | length 47.1
  Top Layer w0.254: P3.1@29.61,95.9 P3.1 ; C1.1 43.25,54 43.5,53.75 U1.1 ; v3(45.15,56.7) v3@45.341,56.509 ; U1.64@46.229,56.509 46.25,56.488 U1.64 ; R3.2 47.5,59.606 v3@48,60.106 ; v3(48,60.25) v3@48,60.106 ; R2.2 48.5,59.606 v3@48,60.106
  Top Layer w0.3: C1.1 42.013,54.013 42.013,55.187 v4(42.025,55.2) ; U4.11 45.25,34.371 45.521,34.1 ; v3@45.341,56.509 U1.64@46.229,56.509 ; U4.3 v7(46.25,33.425) ; U1.19 47.25,42.6 47.5,42.35 C2.1@47.5,42.3 ; v5(47.4,41.425) 47.412,41.437 47.412,42.113 C2.1 ; C13.1 C13.1@49,69.45 ; D1.4@50.475,69.4 50.525,69.45 D1.4@50.525,69.5 ; U1.32 53.75,42.75 53.8,42.7 53.8,42.65 54.275,42.175 55.375,42.175 v4(55.4,42.15) ; U1.48 56.85,53.75 57.85,54.75 C6.2 59.1,54.775 v4(59.1,55.925) ; U3.8 60.775,59.125 61.091,58.809 61.516,58.809 61.65,58.675 62.55,59.575 62.55,60.2 62.325,60.425 U3.6 ; v4(70.175,53.675) 70.182,53.668 70.182,52.507 U2.8 ; R4.2 v4(73.7,41.8)
  Top Layer w0.4: L1.2 32.9,9.8 33.3,10.2 34.7,10.2 34.75,10.25 C17.1 36.05,10.3 36.25,10.3 37.75,11.8 R21.2 ; C4.1 45.1,59.35 45,59.25 C5.1 45.05,57.95 45.05,56.8 v3(45.15,56.7) ; 45.521,34.1 46.196,33.425 v7(46.25,33.425) ; D5.2 v4(64.275,37.025)
  Top Layer w0.5: R21.2 37.763,11.813 39.688,11.813 v3(39.7,11.8) ; v3(40,40.5) FB1.1
  other v4: 61.858,58.665 49.75,70.5
+3V3A: C11.1 C12.1 FB1.2 U1.13 | length 7.9
  Top Layer w0.254: C12.1 C11.1 42.25,47.5 42.5,47.75 U1.13
  Top Layer w0.4: FB1.2 C12.1
+5V: D3.1 J1.1 U5.5 | length 6.1
  Top Layer w0.4: J1.1 4.1,24.6
  Top Layer w0.5: 4.1,24.6 v3(5,25.5) ; v6(10.225,23.675) 10.238,23.687 10.238,24.788 U5.5 ; D3.1 21.175,24.475 21.175,26.425 v3(21.25,26.5)
+VCC: P2.2 Q1.3 | length 26.1
  Top Layer w0.5: P2.2@3.392,40.7 8.1,40.7 17.4,31.4 Q1.3
ADC1_IN0: R10.1 U1.14 | length 70.7
  Top Layer w0.2: U1.14 44.412,47.262 52.787,47.262 v1(52.8,47.275) ; v1(58.775,42.275) 58.775,40.875 59.2,40.45 ; 69.708,24.708 69.725,24.725
  Top Layer w0.25: 59.2,40.45 69.375,40.45 69.725,40.1 69.725,24.725 ; 69.708,24.708 85.666,8.75 R10.1
  Bottom Layer w0.2: v1(52.8,47.275) 53.725,47.275 v1@58.75,42.25
ADC1_IN1: R13.1 U1.15 | length 68.6
  Top Layer w0.2: U1.15 52.557,46.75 52.757,46.55 v1(52.825,46.55) ; v1(59.3,41.125) 59.35,41.125 59.6,40.875 69.975,40.875
  Top Layer w0.25: 69.975,40.875 70.4,40.45 70.4,25.025 84.175,11.25 R13.1
  Bottom Layer w0.2: v1(52.825,46.55) 53.575,46.55 59,41.125 v1(59.3,41.125)
ADC1_IN2: R16.1 U1.16 | length 47.5
  Top Layer w0.2: v1@40.65,34.375 v1(40.675,34.4) ; U1.16 44.412,46.238 48.388,46.238 v1(48.4,46.225) ; R16.1@51.225,10.9 51.225,10.85 51.35,10.725 R16.1
  Top Layer w0.25: v1@40.65,34.375 40.65,21.475 R16.1@51.225,10.9
  Bottom Layer w0.2: v1(40.675,34.4) 41.225,34.4 48.425,41.6 48.425,46.2 v1(48.4,46.225)
ADC1_IN3: R19.1 U1.17 | length 39.2
  Top Layer w0.2: U1.17 46.25,43.1 45.85,42.7 45.85,40.642 45.967,40.525 47.325,40.525 v1(48,39.85) ; v1(49.371,36.879) 49.406,36.879 49.71,36.575 ; R19.1@53.35,10.875 53.475,10.75 R19.1
  Top Layer w0.25: 49.71,36.575 49.835,36.45 52.25,36.45 53.35,35.35 R19.1@53.35,10.875
  Bottom Layer w0.2: v1(48,39.85) 48,39.825 49.325,38.5 49.325,36.925 v1(49.371,36.879)
BOOT0: R5.2 U1.60 | length 9.6
  Top Layer w0.25: R5.2 41.5,58.05 45.325,54.225 47.947,54.225 48.24,54.519 48.24,55.59 U1.60
BOOT1: R6.1 U1.28 | length 4.7
  Top Layer w0.3: R6.1 U1.28
FLASH_!HOLD: U1.37 U2.7 | length 18.7
  Top Layer w0.3: U1.37 57.411,48.25 58.161,49 62.2,49 v1(63,48.2) ; v1(64.5,49.6) 65.2,50.3 67.9,50.3 69.1,51.5 71.124,51.5 71.385,51.761 71.385,52.425 U2.7
  Bottom Layer w0.3: v1(63,48.2) 64.4,49.6 v1(64.5,49.6)
FLASH_!WP: R4.1 U1.38 U2.3 | length 21.6
  Top Layer w0.3: U1.38 56.836,48.75 57.786,49.7 63.2,49.7 67.2,45.7 71.98,45.7 72.73,44.95 U2.3 72.727,44.697 72.727,42.802 R4.1
GND: C1.2 C2.2 C3.2 C4.2 C5.2 C6.1 C7.2 C8.2 C9.1 C10.1 C11.2 C12.2 C13.2 C14.1 C16.2 C17.2 D4.1 J1.5 P1.3 P2.1 P3.4 P4.4 P5.4 P6.4 P7.4 P8.4 P9.3 P9.5 P9.9 Q1.1 R6.2 R7.2 R22.1 R24.1 R29.1 U1.12 U1.18 U1.63 U2.4 U2.9 U3.1 U3.7 U4.4 U4.6 U4.7 U5.2 U6.2 Y1.2 Y1.4 | length 8.5
  Top Layer w0.254: C11.2 42.75,48.5 43,48.25 U1.12 ; U1.63 U1.63@46.75,56.512
  Top Layer w0.3: C2.2 46.425,42.4 46.75,42.725 U1.18
  Top Layer w0.4: v4(32,52.25) 32,50.825 Y1.4@32.4,50.425 ; Y1.2@33.975,49.2 Y1.2 ; C7.2@37.5,50.95 C7.2
  other v3: 30.75,23.025 63.425,43.975 78.475,48.55 32.275,58.9 48.025,62.875 51.875,64.925 41,96
HSE_IN: C8.1 U1.5 Y1.1 | length 19.6
  Top Layer w0.254: v2@42.75,51.75 U1.5
  Top Layer w0.3: v2(42.713,51.788) v2@42.75,51.75
  Top Layer w0.4: v2(31,47.5) 31,48.425 31.775,49.2 Y1.1 32,49.1 C8.1
  Bottom Layer w0.254: 39.787,51.788 v2(42.713,51.788)
  Bottom Layer w0.3: 36.1,48.1 39.787,51.788
  Bottom Layer w0.4: v2(31,47.5) 35.5,47.5 36.1,48.1
HSE_OUT: R1.2 U1.6 | length 9.8
  Top Layer w0.2: 39.65,51.25 U1.6
  Top Layer w0.3: R1.2 35.05,52.2 38.7,52.2 39.65,51.25
I2C1_SCL: R2.1 R8.1 U1.61 | length 44.1
  Top Layer w0.2: R8.1 32.25,80.5 49.1,63.65 49.1,58.55 48.55,58 R2.1
  Top Layer w0.254: U1.61 47.75,57 48,57.25 48.25,57.25 48.5,57.5 R2.1
I2C1_SDA: R3.1 R11.1 U1.62 | length 41.9
  Top Layer w0.2: R11.1 34.8,91.95 34.8,80.979 ; v2@34.775,77.1 46.9,64.975 46.9,58.55 47.45,58 R3.1 ; v2(34.8,79) 34.8,80.979 ; 34.825,81.004 34.8,80.979
  Top Layer w0.254: U1.62 47.25,57.25 47.5,57.5 R3.1
  Bottom Layer w0.2: v2@34.775,77.1 34.8,77.125 v2(34.8,79)
  other v2: 34.8,77.1
INT_ACC: U1.10 U4.16 | length 25.1
  Top Layer w0.2: U1.10 49.375,49.25 v1(50.05,48.575) ; U4.16 47.68,33.65 50.8,33.65 51.725,34.575 v1(51.725,35.344)
  Bottom Layer w0.2: v1(50.05,48.575) 51.725,46.9 v1(51.725,35.344)
INT_GYR: U1.11 U4.12 | length 21.6
  Top Layer w0.2: U1.11 48.825,48.75 v1(49.3,48.275) ; U4.12 45.763,34.843 45.763,35.538 v1(45.775,35.55)
  Bottom Layer w0.2: v1(45.775,35.55) 45.775,38.384 48.616,41.225 49.033,41.225 49.15,41.342 49.15,44.875 50.867,46.592 50.867,46.758 49.35,48.275 v1(49.3,48.275)
NetC7_1: C7.1 R1.1 Y1.3 | length 4
  Top Layer w0.4: R1.1 34,50.9 Y1.3 36.35,50.8 36.5,50.95 C7.1
NetC9_2: C9.2 U1.47 | length 3.5
  Top Layer w0.3: U1.47 C9.2
NetC10_2: C10.2 U1.31 | length 3.6
  Top Layer w0.2: C10.2 53.3,41.225 53.3,43.423 53.25,43.473 U1.31
NetC14_2: C14.2 FB2.1 R20.2 U6.5 | length 14.3
  Top Layer w0.4: C14.2 16.7,14.625 16.7,12.935 16.935,12.7 22.375,12.7 R20.2 22.575,12.5 23.9,12.5 26.65,15.25 U6.5
NetC15_1: C15.1 D4.2 L1.1 U6.6 | length 8.4
  Top Layer w0.4: D4.2 L1.1 28,9.9 C15.1 28,12.85 27.7,13.15 U6.6
NetC15_2: C15.2 U6.1 | length 2.5
  Top Layer w0.4: C15.2 29.6,12.8 30.3,13.5 U6.1 U6.1@30.4,14.2
NetD2_1: D2.1 R7.1 | length 1.3
  Top Layer w0.3: D2.1 39.225,59.625 40.475,59.625 R7.1
NetD2_2: D2.2 P1.2 R5.1 | length 42.6
  Top Layer w0.3: D2.2 39.225,58.125 40.475,58.125 R5.1 40.5,58.15 41.225,58.875 42.225,58.875 42.625,59.275 v1(42.625,68.175) ; v1(43.975,69.575) 43.975,87.525 47.25,90.8 P1.2
  Bottom Layer w0.3: v1(42.625,68.175) 42.625,68.2 43.975,69.55 v1(43.975,69.575)
NetD3_2: D3.2 F1.2 Q1.2 | length 15.9
  Top Layer w0.5: F1.2 10.55,15.3 14.5,19.25 17.75,19.25 18.3,19.8 18.3,20.75 Q1.2 D3.2
NetD5_1: D5.1 R29.2 | length 1.6
  Top Layer w0.5: R29.2 D5.1
NetF1_1: F1.1 FB2.2 | length 1.7
  Top Layer w0.4: F1.1 FB2.2
NetP3_2: P3.2 R8.2 | length 3
  Top Layer w0.2: P3.2@32.2,95.95 P3.2
  Top Layer w0.25: P3.2@32.2,95.95 32.25,95.9 R8.2
NetP3_3: P3.3 R11.2 | length 3
  Top Layer w0.25: R11.2 34.77,93.02 34.77,95.98 P3.3
NetP4_2: P4.2 R9.2 | length 3.5
  Top Layer w0.25: R9.2 P4.2
NetP4_3: P4.3 R12.2 | length 3.5
  Top Layer w0.25: R12.2 90.27,37.52 93.73,37.52 P4.3
NetP5_2: P5.2 R10.2 | length 3.5
  Top Layer w0.25: R10.2 90.27,8.73 93.73,8.73 P5.2
NetP5_3: P5.3 R13.2 | length 3.5
  Top Layer w0.25: R13.2 P5.3
NetP6_2: P6.2 R14.2 | length 3.6
  Top Layer w0.25: R14.2 90.25,74.025 90.35,74.125 93.625,74.125 P6.2
NetP6_3: P6.3 R17.2 | length 3.8
  Top Layer w0.25: R17.2 92.472,76 93.262,76.79 P6.3
NetP7_2: P7.2 R15.2 | length 3.5
  Top Layer w0.25: R15.2 90.27,21.73 93.73,21.73 P7.2
NetP7_3: P7.3 R18.2 | length 3.5
  Top Layer w0.25: R18.2 P7.3
NetP8_2: P8.2 R16.2 | length 3.3
  Top Layer w0.25: P8.2 51.305,6.595 51.305,9.63 R16.2
NetP8_3: P8.3 R19.2 | length 3.4
  Top Layer w0.25: R19.2 53.525,9.75 53.625,9.65 53.625,6.625 P8.3
NetP9_2: P9.2 R25.2 | length 2.5
  Top Layer w0.25: R25.2 91.235,87 92.405,88.17 P9.2
NetP9_4: P9.4 R26.2 | length 3.1
  Top Layer w0.25: R26.2 90.5,91.05 92.5,93.05 P9.4
NetP9_6: P9.6 R27.2 | length 2.1
  Top Layer w0.25: R27.2 95.02,83.52 95.02,85.61 P9.6
NetP9_10: P9.10 R28.2 | length 5.9
  Top Layer w0.25: R28.2 90.941,95.975 91.088,96.121 91.088,96.375 91.915,97.202 93.628,97.202 P9.10
NetR20_1: R20.1 R22.2 U6.4 | length 6.9
  Top Layer w0.4: R20.1 R22.2 22.562,16.137 27.638,16.137 U6.4
NetR21_1: R21.1 R23.2 U6.3 | length 9.5
  Top Layer w0.4: U6.3 33,16.2 33.875,15.325 R23.2 R21.1
NetR23_1: R23.1 R24.2 | length 1.5
  Top Layer w0.4: R23.1 R24.2
NRST: R28.1 U1.7 | length 68.2
  Top Layer w0.2: U1.7 46.85,50.75 v1(49.725,53.625) ; v1(55.025,66.5) v1@55.025,66.55
  Top Layer w0.25: v1@55.025,66.55 84.45,95.975 R28.1
  Bottom Layer w0.2: v1(49.725,53.625) 49.725,59.375 55.025,64.675 v1(55.025,66.5)
SPI1_!CS_ACC: U1.20 U4.5 | length 20.5
  Top Layer w0.2: v1(41.4,36.475) 41.4,31.65 41.825,31.225 44.85,31.225 45.225,31.6 45.225,32.475 U4.5 ; U1.20 47.75,43.043 47.825,42.968 v1(47.825,42.9)
  Bottom Layer w0.2: v1(41.4,36.475) 47.05,42.125 v1(47.825,42.9)
SPI1_!CS_GYR: U1.24 U4.14 | length 11.9
  Top Layer w0.2: v1(46.725,36.55) 46.738,36.537 46.738,34.842 U4.14 ; v1(48,36.575) 48.048,36.623 48.248,36.623 ; U1.24 49.75,42.95 50,42.7
  Top Layer w0.25: 48.248,36.623 49.6,37.975 49.625,37.975 50,38.35 50,42.7
  Bottom Layer w0.2: v1(46.725,36.55) 46.737,36.562 47.988,36.562 v1(48,36.575)
SPI1_MISO: U1.22 U4.10 U4.15 | length 14.5
  Top Layer w0.2: v1(44.7,34) 44.7,34.12 44.75,34.17 U4.10 ; v1@46.932,34.125 47.225,34.418 47.225,34.805 U4.15 47.25,37.55 49.125,39.425 49.125,42.225 48.75,42.6 U1.22
  Bottom Layer w0.2: v1@44.7,34.135 44.765,34.135 44.789,34.111 46.901,34.111 v1(46.94,34.072)
SPI1_MOSI: U1.23 U4.9 | length 12.9
  Top Layer w0.2: U4.9 44.25,35.375 v1(46.8,37.925) ; v1(48.6,38.1) v1@48.6,38.168 ; U1.23 49.25,42.7 49.525,42.425 49.525,39.025
  Top Layer w0.25: v1(48.6,38.1) 49.525,39.025
  Bottom Layer w0.2: v1(46.8,37.925) 46.868,37.925 47.043,38.1 v1(48.6,38.1)
SPI1_SCK: U1.21 U4.8 | length 14.6
  Top Layer w0.2: U4.8 43.81,33.69 43.492,33.69 43.375,33.807 43.375,36.35 46.15,39.125 48.1,39.125 48.625,39.65 48.625,42.05 48.35,42.325 48.35,43.117 48.269,43.198 48.269,44.381 U1.21
SPI2_!CS: U1.33 U2.1 | length 17.6
  Top Layer w0.3: U1.33 56.5,46.25 60.15,42.6 69.2,42.6 70.19,43.59 U2.1
SPI2_MISO: U1.35 U2.2 | length 19.2
  Top Layer w0.3: U1.35 57.45,47.25 58.3,46.4 65,46.4 v1(65.4,46) ; v1(71.2,43) 71.385,43.185 71.385,44.625 U2.2
  Bottom Layer w0.3: v1(65.4,46) 68.4,43 v1(71.2,43)
SPI2_MOSI: U1.36 U2.5 | length 24.6
  Top Layer w0.25: U1.36 57.85,47.75
  Top Layer w0.3: 57.85,47.75 58.4,47.2 v1(60.5,47.2) ; v1(73.9,54.7) 73.95,54.65 73.95,52.55 U2.5
  Bottom Layer w0.3: v1(60.5,47.2) 66.1,47.2 71.6,52.7 71.6,54 72.3,54.7 v1(73.9,54.7)
SPI2_SCK: U1.34 U2.6 | length 23.3
  Top Layer w0.3: U1.34 57.155,46.75 58.105,45.8 v1(58.8,45.8) ; U2.6 72.765,52.535 72.765,53.965 v1(72.8,54)
  Bottom Layer w0.3: v1(58.8,45.8) 63.8,45.8 64.6,46.6 66.7,46.6 72.8,52.7 v1(72.8,54)
SPI3_!CS: U1.50 U3.2 | length 8.4
  Top Layer w0.3: U1.50 53.25,57.05 55.156,58.956 55.706,58.956 56.525,59.775 U3.2
SPI3_MISO: U1.52 U3.5 | length 14
  Top Layer w0.3: v8(52.25,53.95) U1.52 ; v2@60.7,61.7 U3.5 60.725,61.1 U3.5@60.8,61.1
  Bottom Layer w0.3: v8(52.25,53.95) 52.95,53.95 v2@60.7,61.7
  other v2: 60.86,61.827
SPI3_MOSI: U1.53 U3.3 | length 10.2
  Top Layer w0.3: U1.53 51.75,56.5 51.75,56.988 54.082,59.32 54.12,59.32 55.2,60.4 59.075,60.4 U3.3
SPI3_SCK: U1.51 U3.4 | length 11.4
  Top Layer w0.3: v1(52.677,57.102) 52.706,57.073 52.706,56.751 52.75,56.707 U1.51@52.75,56.505 ; U1.51 U1.51@52.75,56.5 ; v1(52.9,60.3) 52.941,60.3 53.016,60.375 53.075,60.375 53.8,61.1 59.075,61.1 U3.4
  Bottom Layer w0.3: v1(52.677,57.102) 52.677,57.143 52.9,57.365 v1(52.9,60.3)
SWCLK: R26.1 U1.49 | length 50.9
  Top Layer w0.2: U1.49 53.75,56.5 55.077,57.827 55.277,57.827 v1(55.325,57.875)
  Top Layer w0.25: v1(59.975,62.475) 88.5,91 R26.1
  Bottom Layer w0.2: v1(55.325,57.875) 55.35,57.875 59.95,62.475 v1(59.975,62.475)
SWDIO: R25.1 U1.46 | length 55.5
  Top Layer w0.2: 53.825,53.45 53.825,53.775 ; 54.506,52.769 55.581,52.769 U1.46
  Top Layer w0.25: 53.825,53.45 54.506,52.769 ; 53.825,53.775 57.875,57.825 63.179,57.825 63.325,57.971 63.325,64.2 86.15,87.025 89.475,87.025 R25.1
SWO: R27.1 U1.55 | length 57.8
  Top Layer w0.2: U1.55 50.769,55.619 50.769,56.769 51.8,57.8
  Top Layer w0.25: 51.8,57.8 51.8,60.6 60.65,69.45 v1(65.575,69.45) ; v1(69.425,69.35) 82.575,82.5 R27.1
  Bottom Layer w0.25: v1(65.575,69.45) 69.271,69.45 69.371,69.35 v1(69.425,69.35)
TIM2_CH3: R9.1 U1.29 | length 42.4
  Top Layer w0.2: U1.29 52.25,42.018 52.35,41.918 v1(52.35,41.85) ; v1(72.7,39.075) 85.175,39.075 89.075,35.175 89.125,35.175 89.25,35.05 R9.1
  Bottom Layer w0.2: v1(52.35,41.85) 52.35,41.825 55.075,39.1 72.675,39.1 v1(72.7,39.075)
TIM2_CH4: R12.1 U1.30 | length 40.6
  Top Layer w0.2: U1.30 52.762,44.388 52.762,42.388 v1(52.775,42.375) ; v1(72.675,40.025) 86.725,40.025 89.075,37.675 89.125,37.675 89.25,37.55 R12.1
  Bottom Layer w0.2: v1(52.775,42.375) 52.775,42.35 55.1,40.025 v1(72.675,40.025)
TIM3_CH1: D1.3 U1.56 | length 14.9
  Top Layer w0.2: U1.56 50.25,57.45 51.2,58.4
  Top Layer w0.254: 51.2,58.4 51.2,61.2 54,64 54,66.05 D1.3
TIM3_CH2: D1.2 U1.57 | length 15
  Top Layer w0.2: U1.57 49.75,57.575 50.7,58.525
  Top Layer w0.254: 50.7,58.525 50.746,58.571 50.746,61.446 53.5,64.2 53.5,65.75 51.777,67.473 51.64,67.473 51.448,67.665 51.448,67.702 51.25,67.9 D1.2
TIM3_CH3: R15.1 U1.26 | length 51.9
  Top Layer w0.2: 50.675,40.4 50.7,40.425 50.7,43.379 50.731,43.41 50.731,44.381 U1.26
  Top Layer w0.25: 50.675,40.4 50.525,40.25 50.525,38.05 51.675,36.9 58.075,36.9 v1(60.55,34.425) ; v1(72.625,32.925) 83.8,21.75 R15.1
  Bottom Layer w0.25: v1(60.55,34.425) 71.125,34.425 v1(72.625,32.925)
TIM3_CH4: R18.1 U1.27 | length 50.2
  Top Layer w0.2: 51.168,43.246 51.168,43.281 51.2,43.314 51.2,43.423 51.25,43.473 U1.27
  Top Layer w0.25: 51.168,43.246 51.15,43.228 51.15,38.125 51.9,37.375 58.775,37.375 v1(60.575,35.575) ; v1(72.65,34.55) 82.95,24.25 R18.1
  Bottom Layer w0.25: v1(60.575,35.575) 71.625,35.575 v1(72.65,34.55)
TIM4_CH1: D1.1 U1.58 | length 13
  Top Layer w0.2: U1.58 49.269,55.619 49.269,56.59 49.3,56.621 49.3,57.691 50.3,58.691 50.3,64.8
  Top Layer w0.254: 50.3,64.8 50.525,65.025 D1.1
USART1_RX: R17.1 U1.43 | length 43.9
  Top Layer w0.2: R17.1@89.125,75.875 R17.1
  Top Layer w0.25: U1.43 64.1,51.25 88.725,75.875 R17.1@89.125,75.875
USART1_TX: R14.1 U1.42 | length 43.3
  Top Layer w0.2: R14.1@89.125,73.825 89.25,73.95 R14.1
  Top Layer w0.25: U1.42 64.325,50.75 87.4,73.825 R14.1@89.125,73.825
USB_CONN_D_N: J1.3 U5.1 | length 7.8
  Top Layer w0.381: J1.3 5.102,23.3 6.046,22.356 6.046,22.346 6.812,21.579 8.073,21.579 8.31,21.816 9.19,21.816 9.3,21.925 U5.1
USB_CONN_D_P: J1.2 U5.3 | length 12.1
  Top Layer w0.381: J1.2 5.371,23.95 6.696,22.626 6.696,22.615 6.927,22.384 v2@7.242,22.384 ; v2(7.3,20.8) 10.977,20.8 11.2,21.023 U5.3
  Bottom Layer w0.381: v2(7.3,20.8) v2(7.3,22.4)
USB_N: U1.44 U5.6 | length 62.8
  Top Layer w0.25: v2(16.2,30.5) 11.279,30.5 9.5,28.721 9.5,26.733 9.5,25.275 U5.6@9.3,25.075 ; v2(18.7,30.5) 33.4,30.5 v2(40.4,37.5) ; v2(50.7,50.5) 51.325,51.125 51.95,51.75 52.95,51.75 U1.44 ; U5.6@9.3,25.075 U5.6 U5.6@9.3,25.075
  Bottom Layer w0.25: v2(16.2,30.5) v2(18.7,30.5) ; v2(40.4,37.5) 45.191,42.291 45.191,46.708 49.28,50.797 49.992,50.797 50.32,50.469 50.669,50.469 v2(50.7,50.5)
USB_P: U1.45 U5.4 | length 62.3
  Top Layer w0.25: U5.4@11.25,24.85 U5.4 11.2,25.075 11,25.275 11,27.354 11,28.1 11.9,29 v2(16.2,29) ; v2(18.7,29) 33,29 v2(40.9,36.9) ; v2(50,49.6) 50,51.1 50.037,51.137 50.4,51.5 51.15,52.25 54,52.25 U1.45
  Bottom Layer w0.25: v2(16.2,29) v2(18.7,29) ; v2(40.9,36.9) 45.8,41.8 45.8,46.456 49.533,50.188 49.74,50.188 49.99,49.938 49.99,49.61 v2(50,49.6)
pads on no net: D1.5 D1.6 J1.4 J1.6 J1.7 J1.8 P9.7 P9.8 U1.2 U1.3 U1.4 U1.8 U1.9 U1.25 U1.39 U1.40 U1.41 U1.54 U1.59 U4.1 U4.2 U4.13

## Polygon pours and split planes (outlines as drawn)
GND on Top Layer "GND_L01_P-001" (solid, remove dead copper, pour order 1): 1.6,94.4 5.5,98.3 5.5,98.8 98.4,98.8 98.5,98.7 98.5,1 2.7,1 2.1,1.6